# Altium PCB Mobo.PcbDoc (part 1 of 3)
Units mm, origin at the board's own origin, x right, y up, seen from the top; angles counter-clockwise.
Board outline 192.03 x 94.33 mm, 5 copper layers (Top Layer, POWER, InternalPlane2, GND, Bottom Layer); 327 components, 282 nets, 956 pads, 380 vias.
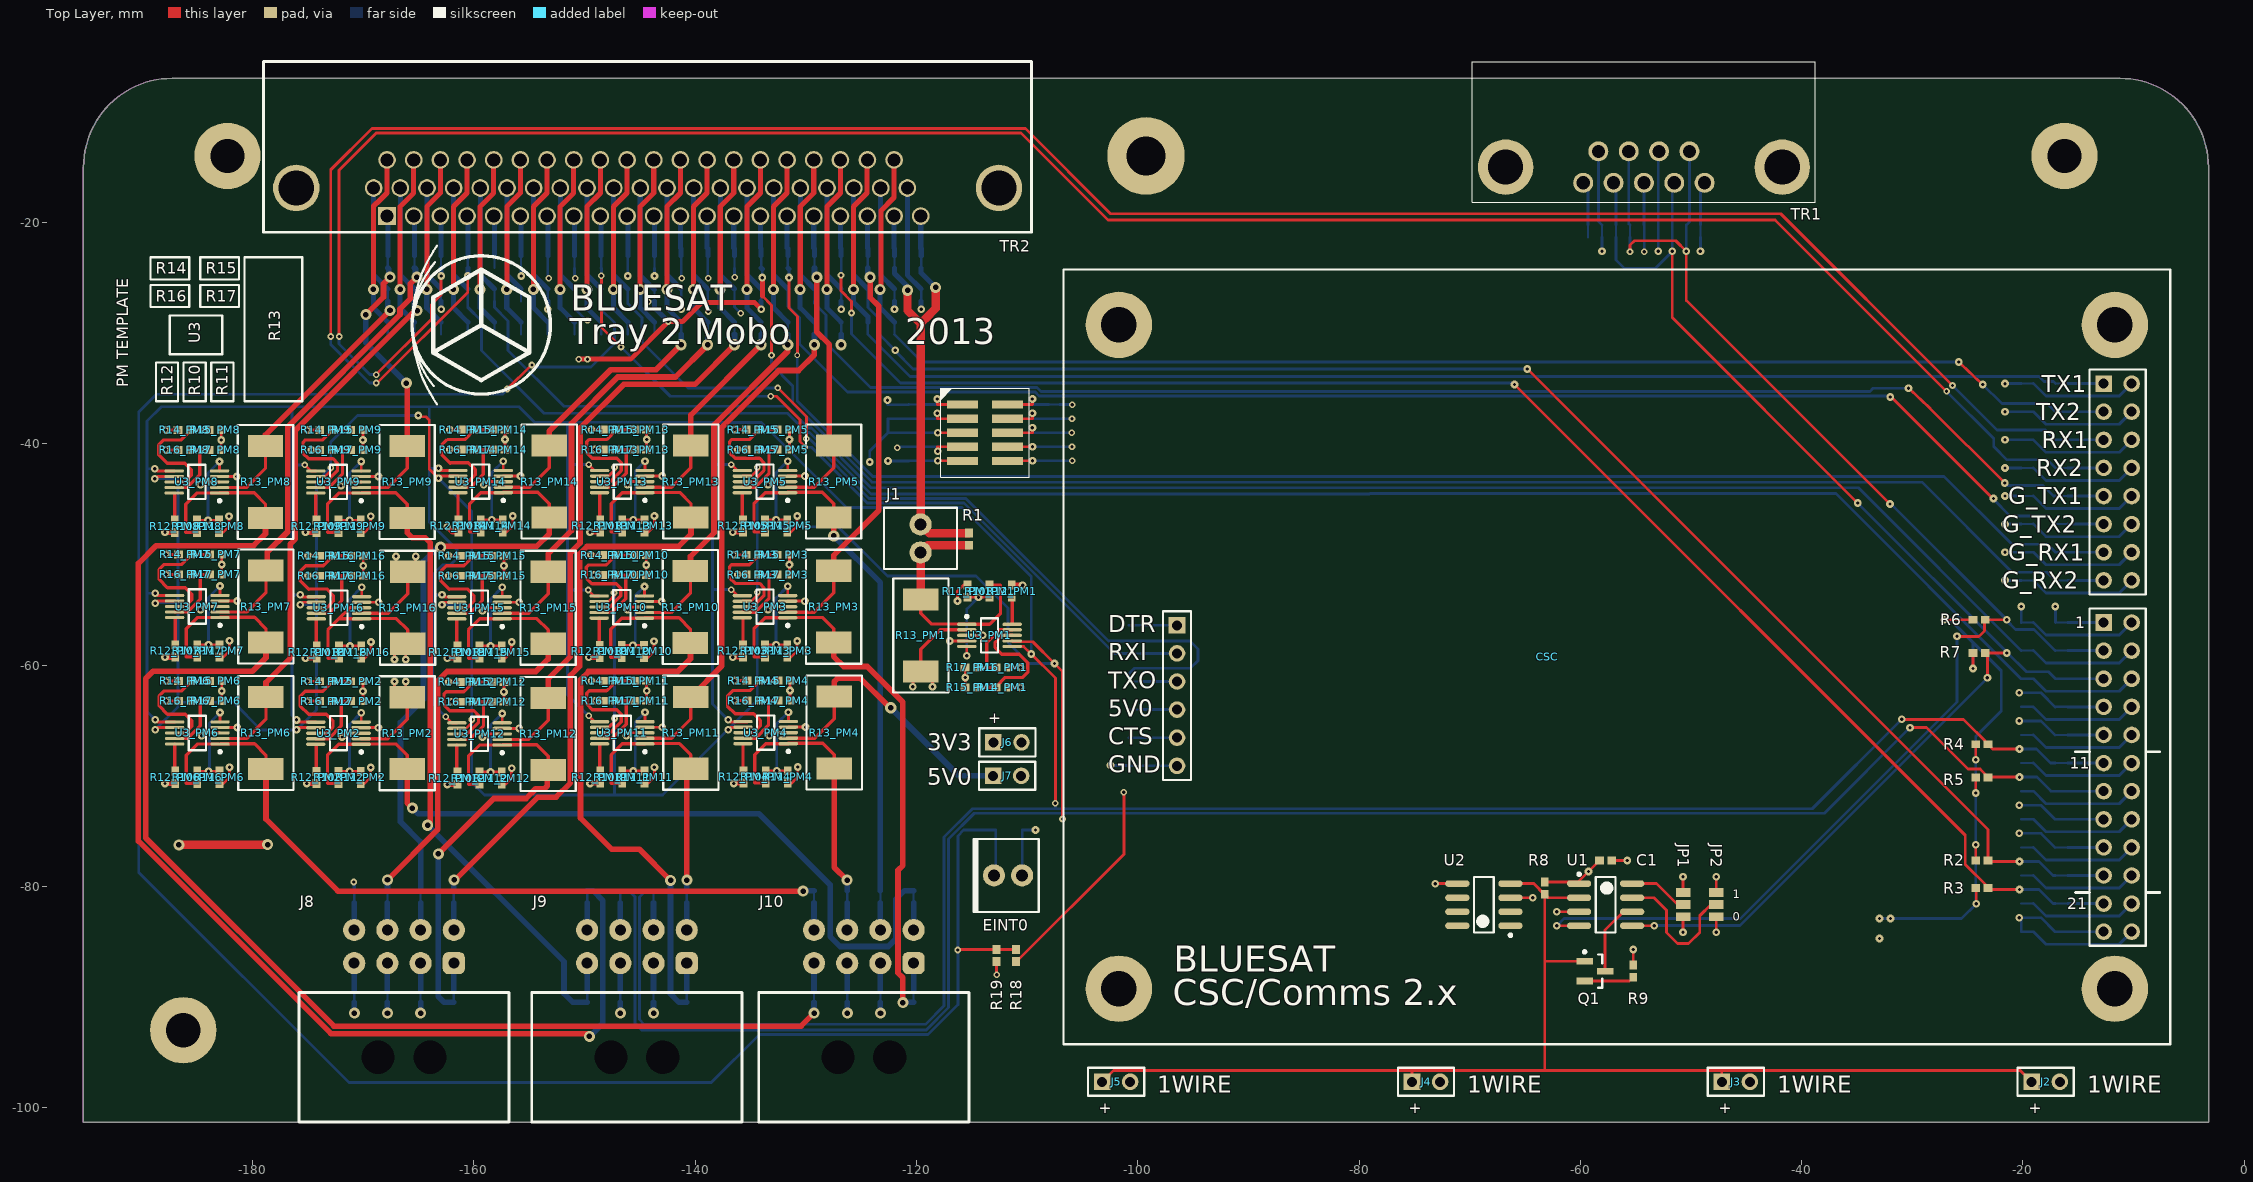
[diagram p0: Top Layer view]
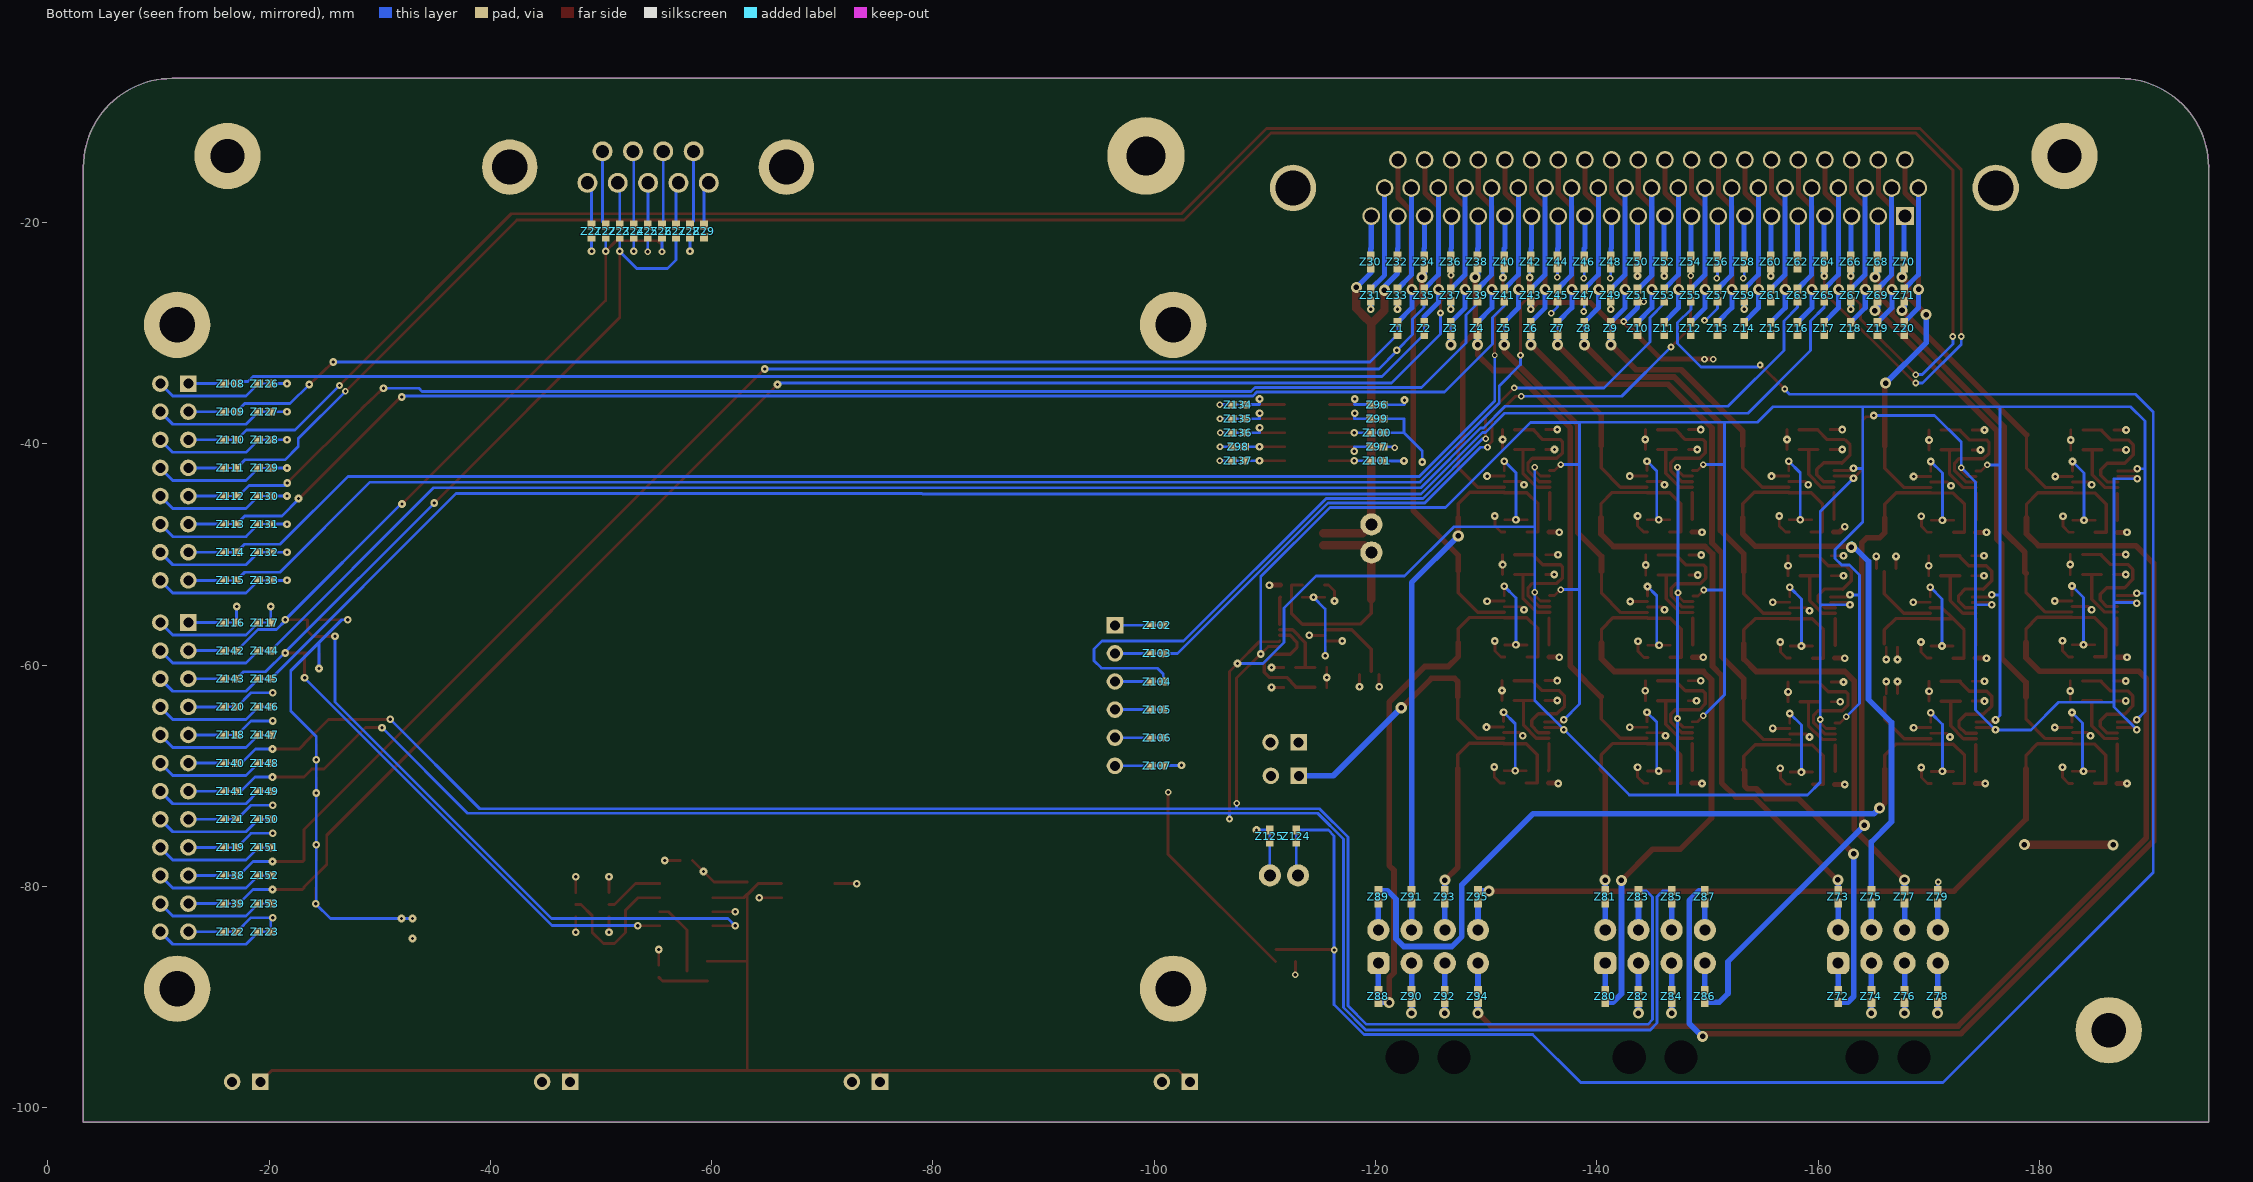
[diagram p1: Bottom Layer view, seen from below]
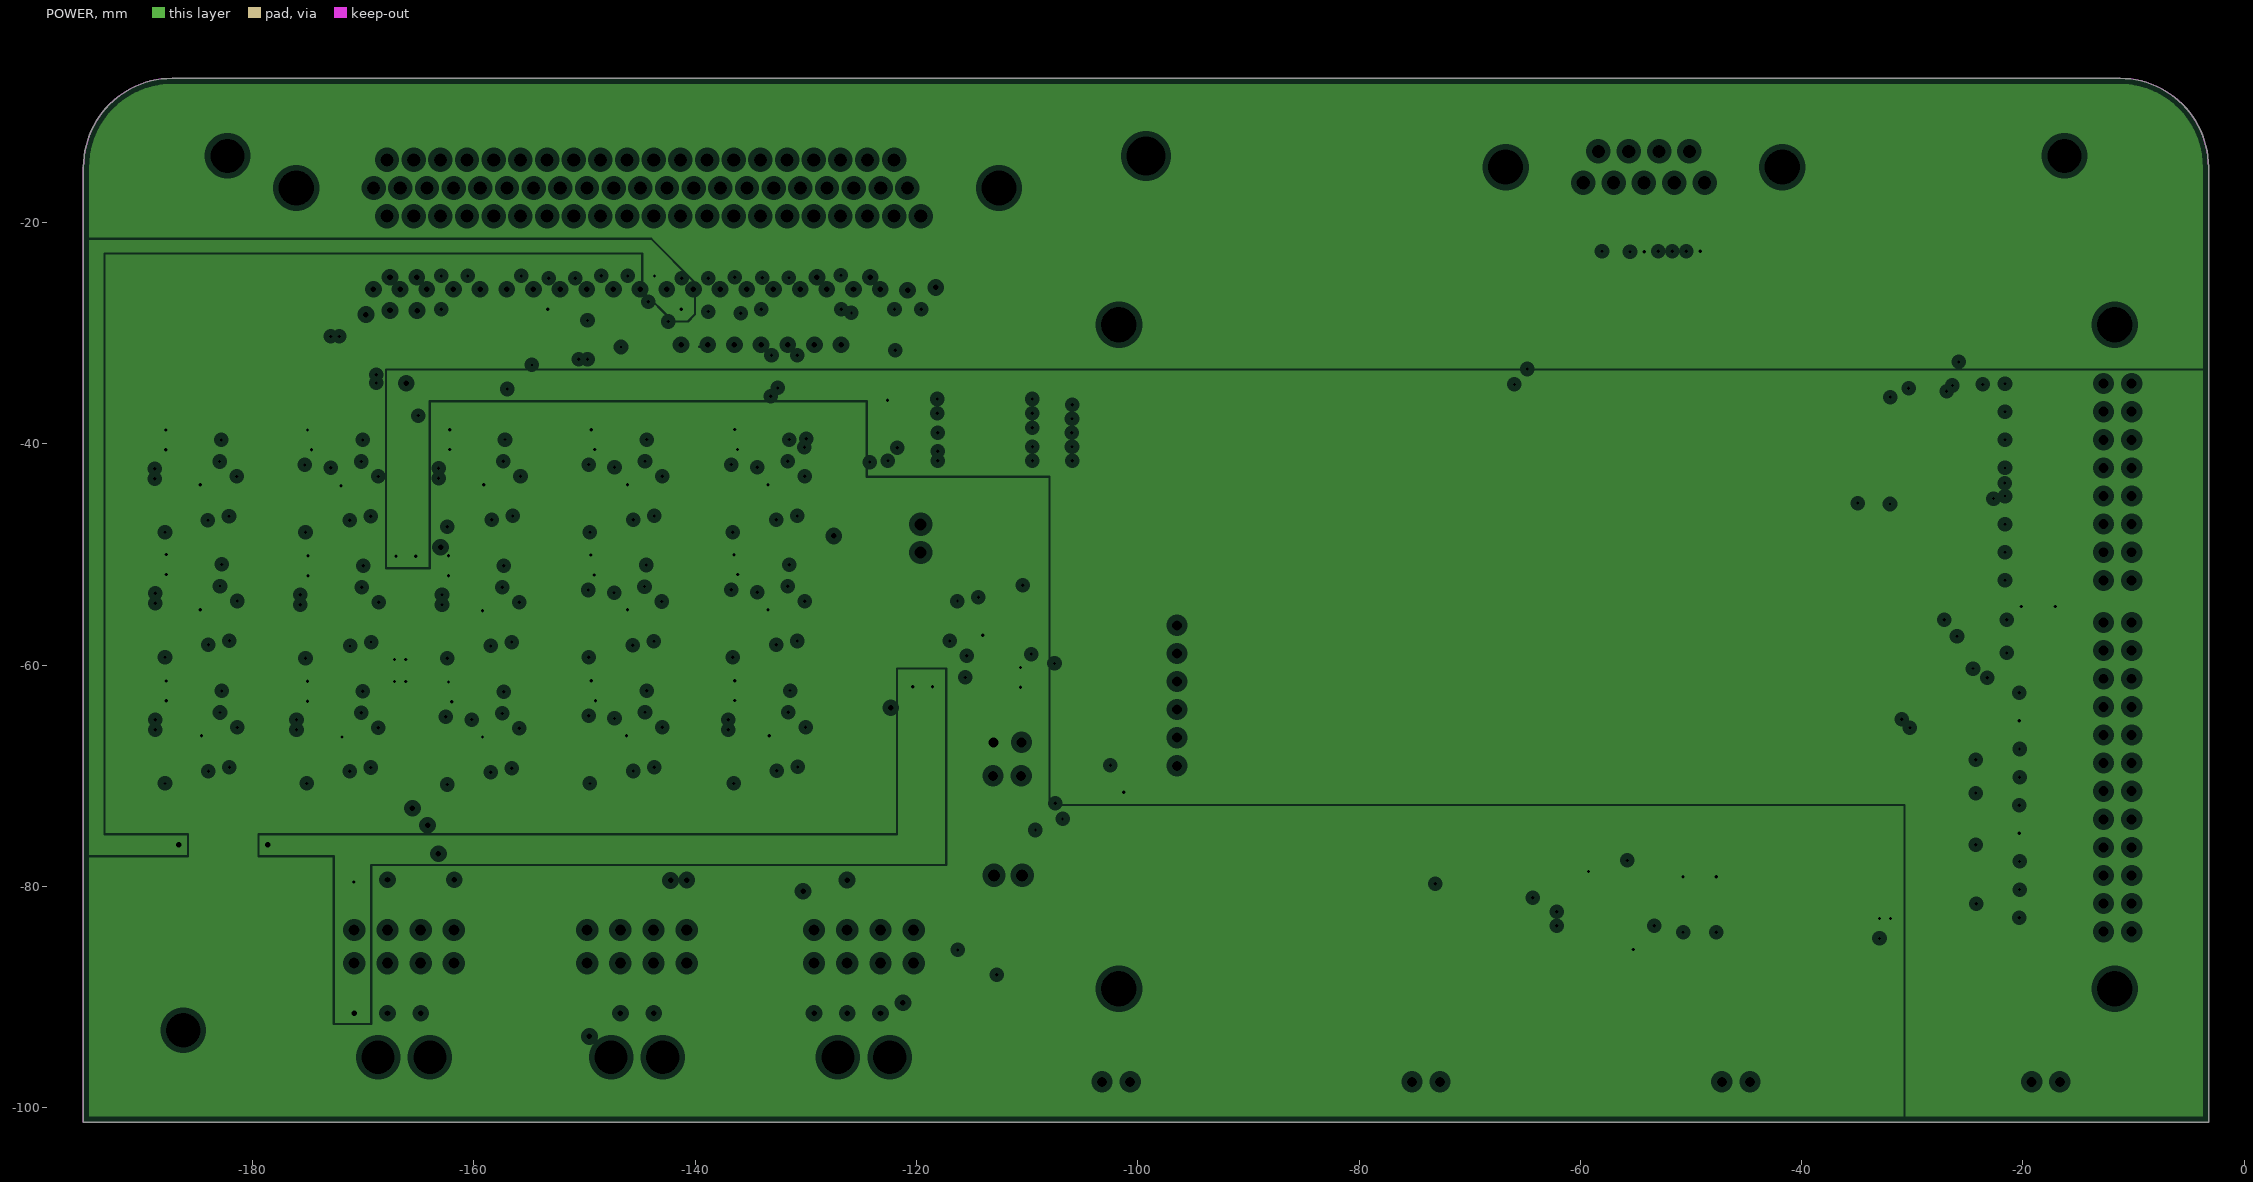
[diagram p2: POWER, clearances drawn from the general rule]
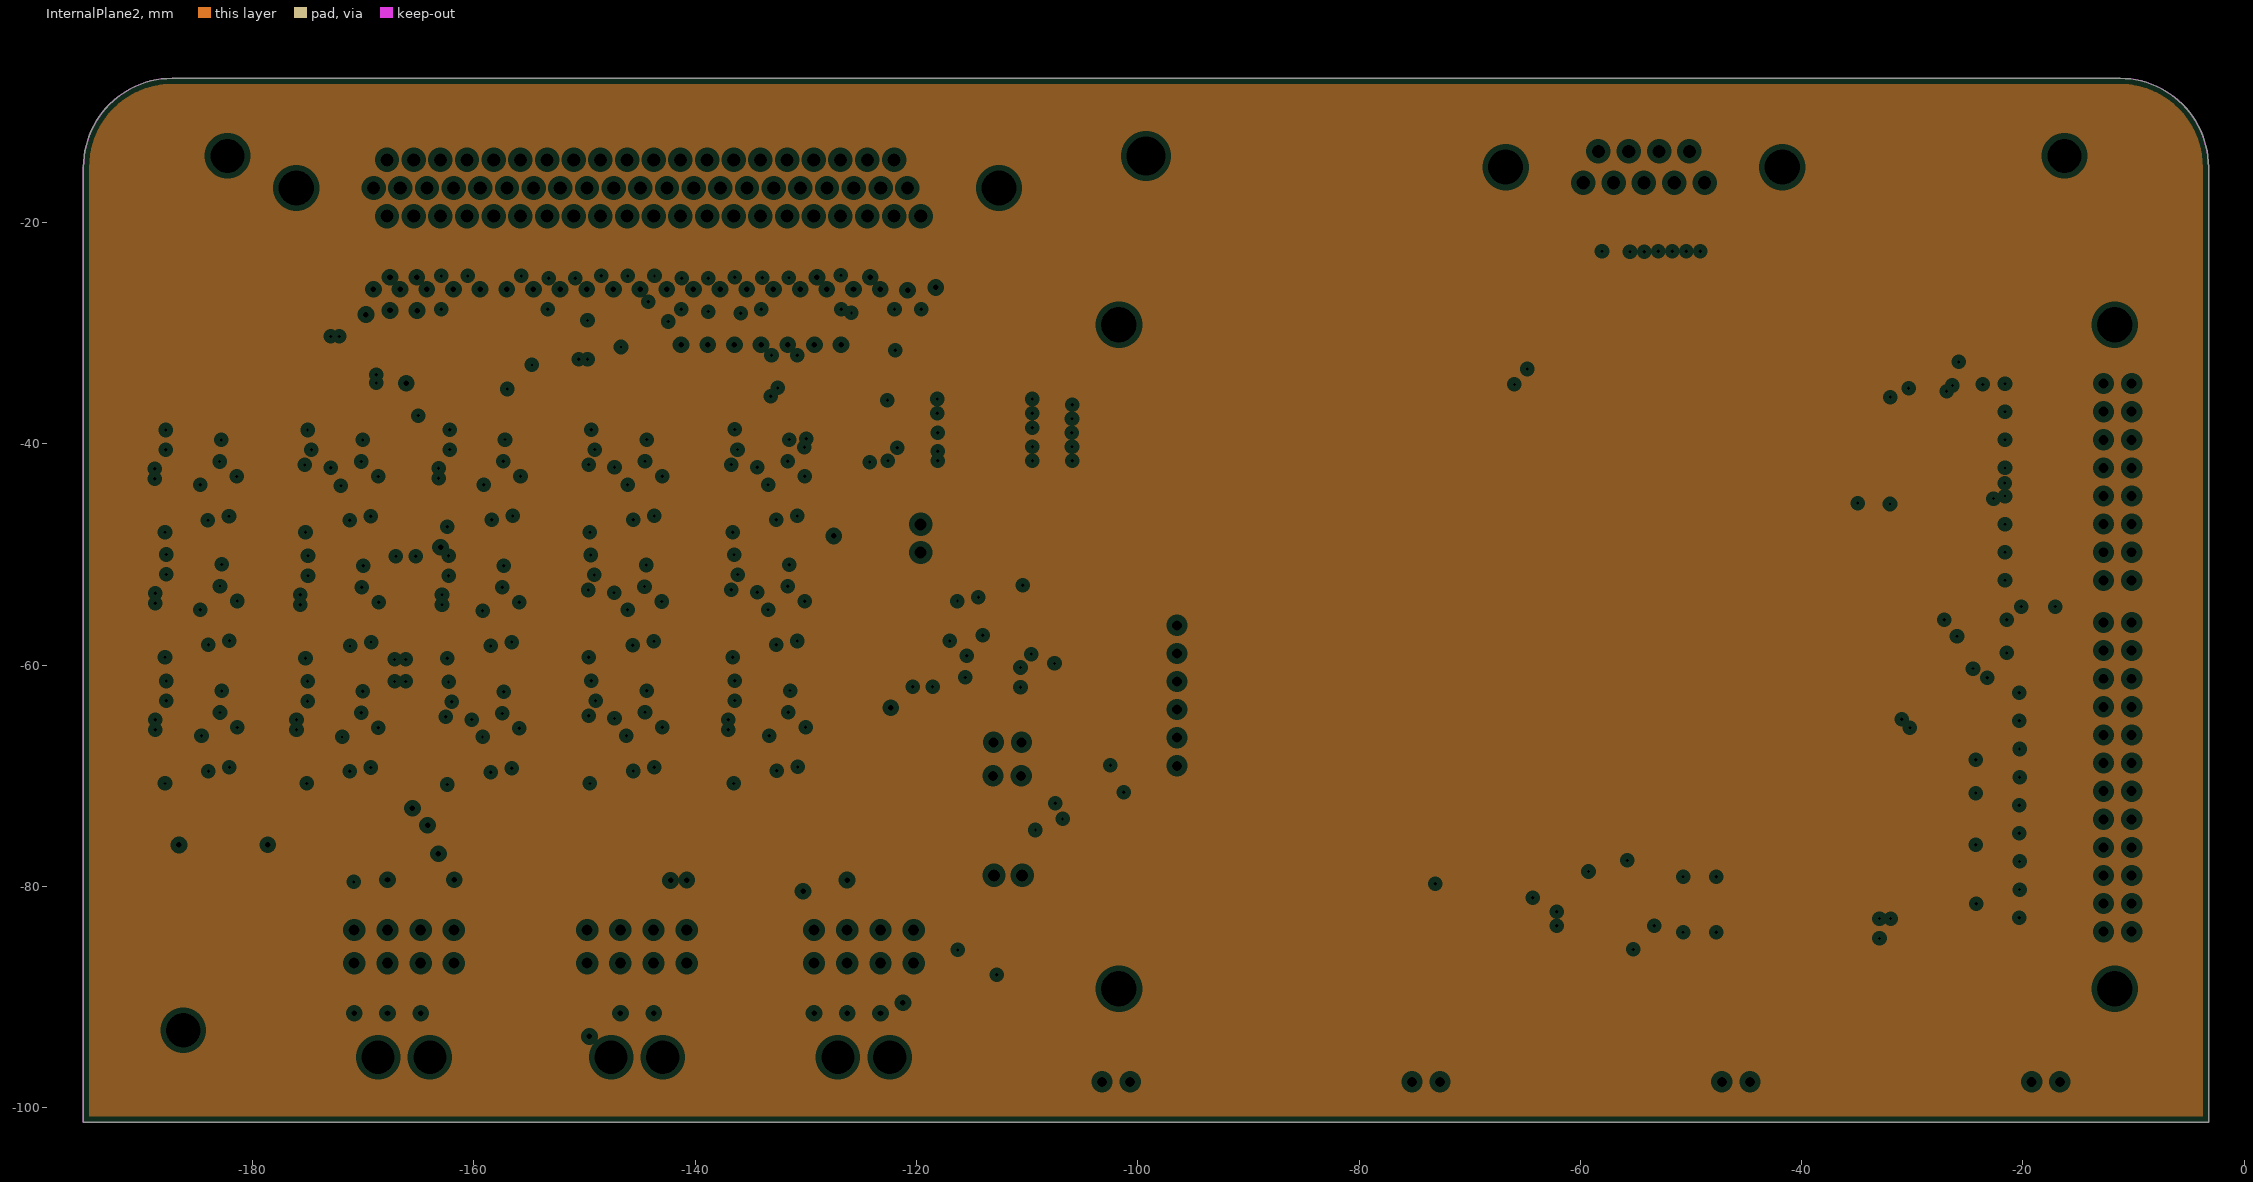
[diagram p3: InternalPlane2, clearances drawn from the general rule]
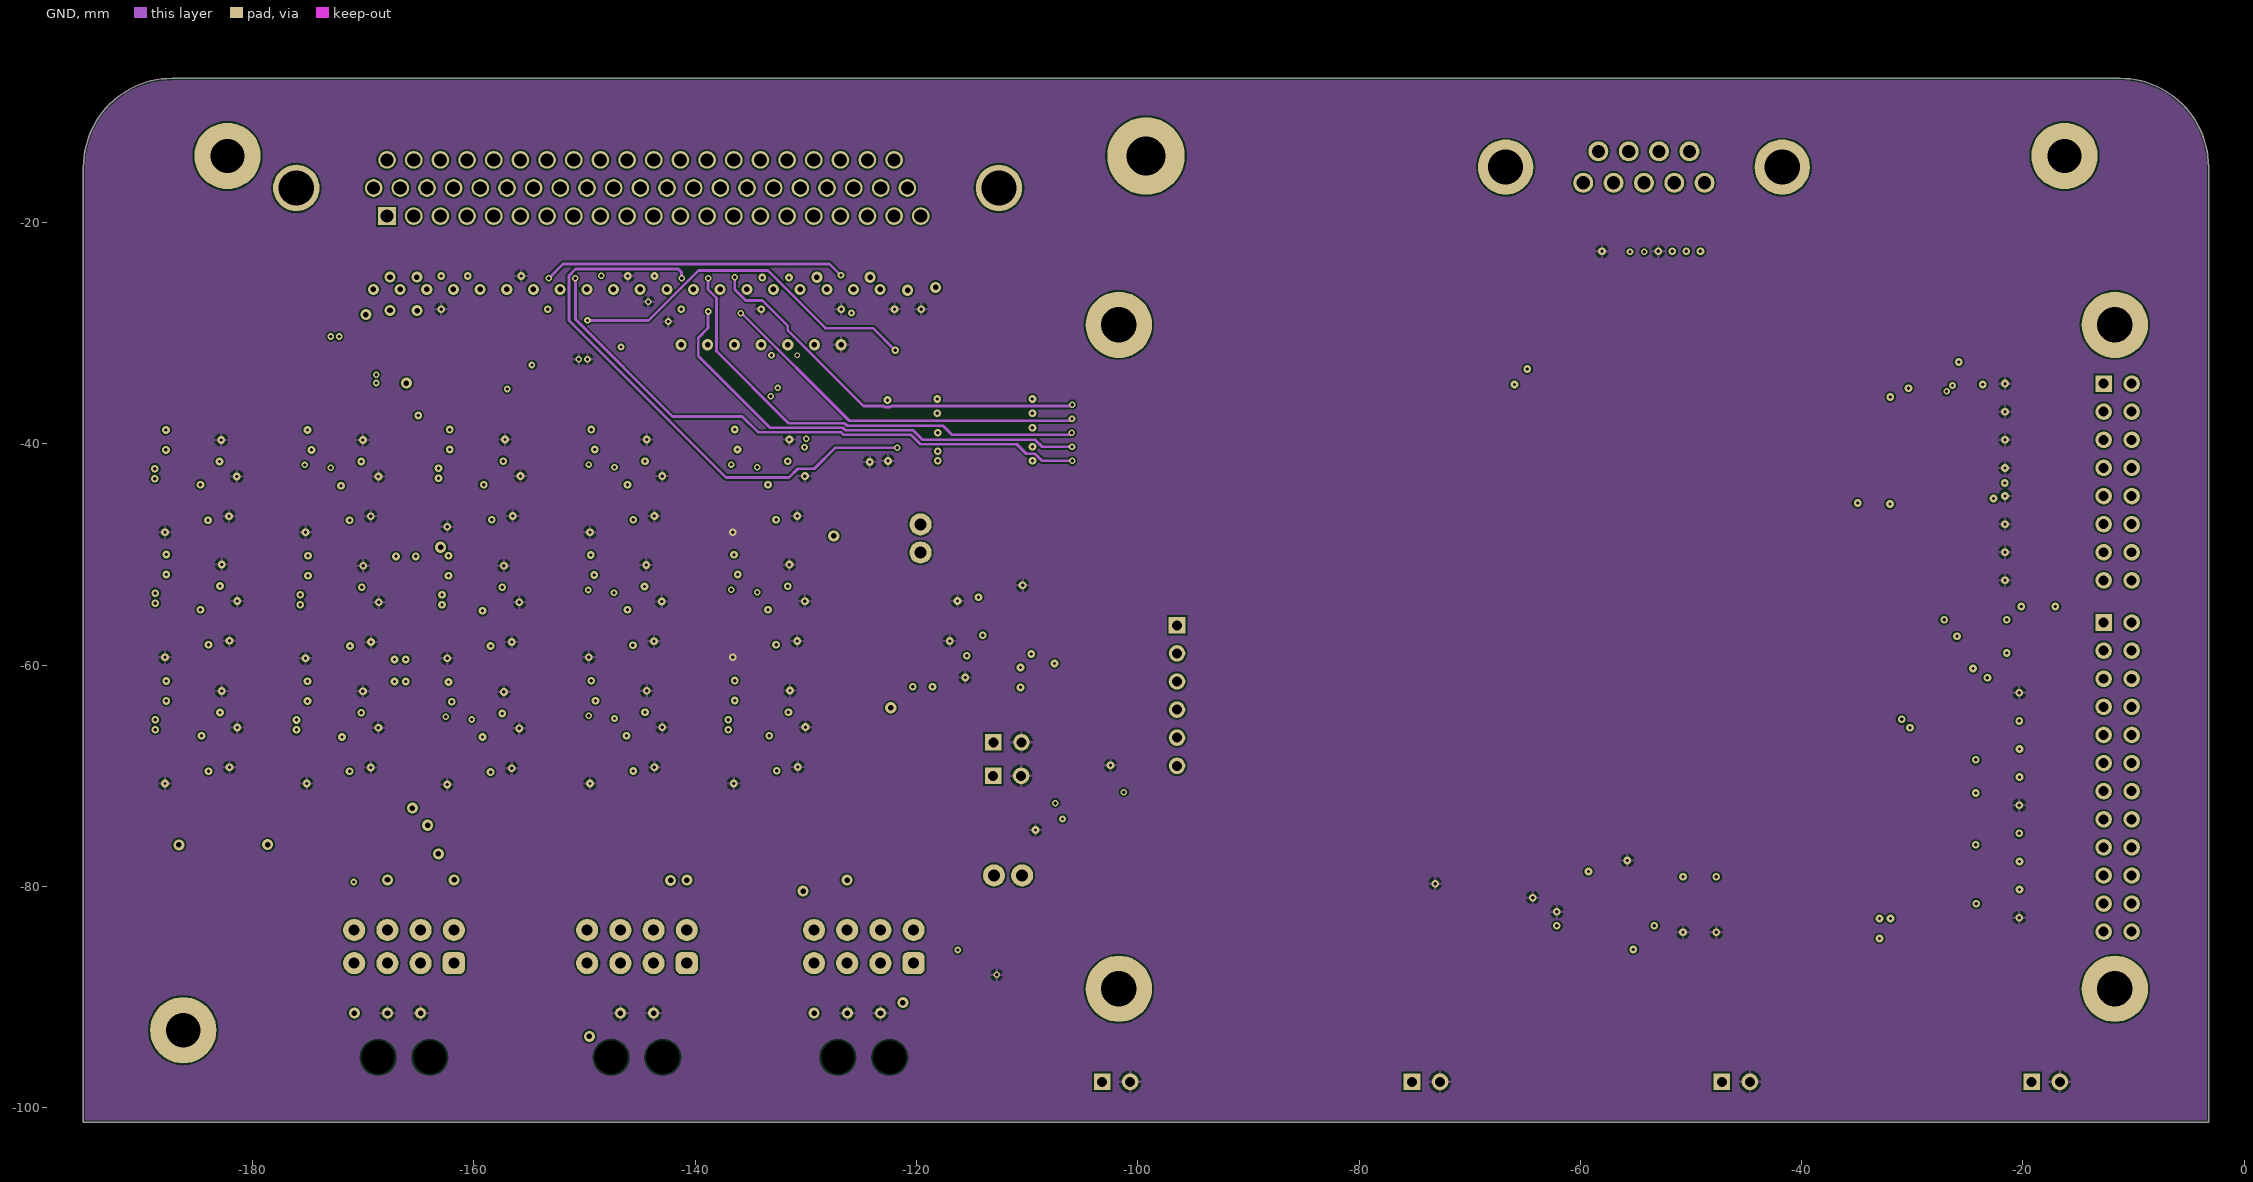
[diagram p4: GND]

## Layer stack, top to bottom
Top Layer: signal copper 0.0356
Dielectric: core 0.32, FR-4, Dk 4.8
POWER: plane copper 0.0356, net (Multiple Nets)
Dielectric: prepreg 0.32, FR-4, Dk 4.8
InternalPlane2: plane copper 0.0356
Dielectric: dielectric 0.32, FR-4, Dk 4.8
GND: signal copper 0.0356
Dielectric: core 0.32, FR-4, Dk 4.8
Bottom Layer: signal copper 0.0356

## Board outline
-195.263,-101.3 -195.263,-15 cw(c-187.25,-15) -187.25,-6.987 -11.25,-6.987 cw(c-11.25,-7) -11.25,-6.987 ccw(c-11.25,-15) -11.25,-6.987 ccw(c-11.25,-7) -11.25,-6.987 cw(c-11.25,-15) -3.237,-15 -3.237,-101.3 cw(c-3.25,-101.3) -3.25,-101.313 -195.25,-101.313 cw(c-195.25,-101.3)

## Design rules (kind name [scope] priority, off if disabled: settings)
AssemblyTestPointUsage [All] p1 off:
AssemblyTestpoint [All] p1 off: testpointundercomponent=TRUE minsize=1.016 maxsize=2.54 preferedsize=1.524 minholesize=0 maxholesize=1.016 preferedholesize=0.813 testpointgrid=0.025 usegrid=TRUE gridtolerance=0 allowsidetop=TRUE allowsidebottom=TRUE
Clearance [All] p1: gap=0.152
ComponentClearance ComponentClearance_1 [OnLayer('Mechanical 1')] p1: gap=-2.54 collisioncheckmode=3 verticalgap=-5.055 showdistances=FALSE
ComponentClearance [All] p2: gap=0.254 collisioncheckmode=3 verticalgap=0.254 showdistances=FALSE
FabricationTestPointUsage [All] p1 off: valid=0 allowmultiple=FALSE
FabricationTestpoint [All] p1 off: side=3 testpointundercomponent=TRUE minsize=1.016 maxsize=2.54 preferedsize=1.524 minholesize=0 maxholesize=1.016 preferedholesize=0.813 testpointgrid=0.025 allowsidetop=TRUE allowsidebottom=TRUE usegrid=TRUE gridtolerance=0
HoleSize [All] p1: absolutevalues=TRUE maxlimit=254 minlimit=0.025 maxpercent=80.000 minpercent=20.000
MinimumSolderMaskSliver [All] p1: minsoldermaskwidth=0.051
PlaneClearance [All] p1: clearance=0.508
PlaneConnect [All] p1: planeconnectstyle=Relief reliefexpansion=0.508 reliefentries=4 reliefconductorwidth=0.254 reliefairgap=0.254
PolygonConnect [All] p1: connectstyle=Relief reliefconductorwidth=0.254 reliefentries=4 polygonreliefangle="90 Angle" airgapwidth=0.254
RoomDefinition PM12 [InComponentClass('PM12')] p1: confinementstyle=ConfineIn formatcopy=TRUE lockcomponents=FALSE outline -150.416,-60.561 -163.016,-60.561 -163.016,-71.761 -150.416,-71.761
RoomDefinition PM1 [InComponentClass('PM1')] p2: confinementstyle=ConfineIn formatcopy=TRUE lockcomponents=FALSE outline -122.45,-62.992 -109.691,-62.992 -109.691,-51.792 -122.45,-51.792
RoomDefinition PM16 [InComponentClass('PM16')] p3: confinementstyle=ConfineIn formatcopy=TRUE lockcomponents=FALSE outline -163.116,-49.161 -175.716,-49.161 -175.716,-60.361 -163.116,-60.361
RoomDefinition PM15 [InComponentClass('PM15')] p4: confinementstyle=ConfineIn formatcopy=TRUE lockcomponents=FALSE outline -150.416,-49.161 -163.016,-49.161 -163.016,-60.361 -150.416,-60.361
RoomDefinition PM14 [InComponentClass('PM14')] p5: confinementstyle=ConfineIn formatcopy=TRUE lockcomponents=FALSE outline -150.316,-37.761 -162.916,-37.761 -162.916,-48.961 -150.316,-48.961
RoomDefinition PM13 [InComponentClass('PM13')] p6: confinementstyle=ConfineIn formatcopy=TRUE lockcomponents=FALSE outline -137.516,-37.761 -150.116,-37.761 -150.116,-48.961 -137.516,-48.961
RoomDefinition PM11 [InComponentClass('PM11')] p7: confinementstyle=ConfineIn formatcopy=TRUE lockcomponents=FALSE outline -137.516,-60.461 -150.116,-60.461 -150.116,-71.661 -137.516,-71.661
RoomDefinition PM10 [InComponentClass('PM10')] p8: confinementstyle=ConfineIn formatcopy=TRUE lockcomponents=FALSE outline -137.557,-49.093 -150.157,-49.093 -150.157,-60.293 -137.557,-60.293
RoomDefinition PM9 [InComponentClass('PM9')] p9: confinementstyle=ConfineIn formatcopy=TRUE lockcomponents=FALSE outline -163.157,-37.793 -175.757,-37.793 -175.757,-48.993 -163.157,-48.993
RoomDefinition PM8 [InComponentClass('PM8')] p10: confinementstyle=ConfineIn formatcopy=TRUE lockcomponents=FALSE outline -175.957,-37.793 -188.557,-37.793 -188.557,-48.993 -175.957,-48.993
RoomDefinition PM7 [InComponentClass('PM7')] p11: confinementstyle=ConfineIn formatcopy=TRUE lockcomponents=FALSE outline -175.916,-49.046 -188.516,-49.046 -188.516,-60.246 -175.916,-60.246
RoomDefinition PM6 [InComponentClass('PM6')] p12: confinementstyle=ConfineIn formatcopy=TRUE lockcomponents=FALSE outline -175.916,-60.476 -188.516,-60.476 -188.516,-71.676 -175.916,-71.676
RoomDefinition PM5 [InComponentClass('PM5')] p13: confinementstyle=ConfineIn formatcopy=TRUE lockcomponents=FALSE outline -124.616,-37.761 -137.216,-37.761 -137.216,-48.961 -124.616,-48.961
RoomDefinition PM4 [InComponentClass('PM4')] p14: confinementstyle=ConfineIn formatcopy=TRUE lockcomponents=FALSE outline -124.557,-60.443 -137.157,-60.443 -137.157,-71.643 -124.557,-71.643
RoomDefinition PM3 [InComponentClass('PM3')] p15: confinementstyle=ConfineIn formatcopy=TRUE lockcomponents=FALSE outline -124.616,-49.061 -137.216,-49.061 -137.216,-60.261 -124.616,-60.261
RoomDefinition PM2 [InComponentClass('PM2')] p16: confinementstyle=ConfineIn formatcopy=TRUE lockcomponents=FALSE outline -163.157,-60.493 -175.757,-60.493 -175.757,-71.693 -163.157,-71.693
RoutingVias [All] p1: holewidth=0.3 width=0.7 viastyle="Through Hole" minholewidth=0.3 minwidth=0.6 maxholewidth=0.711 maxwidth=1.27
SilkToSolderMaskClearance SilkscreenOverComponentPads [IsPad] p1: minsilkscreentomaskgap=0.076 clearancetoexposedcopper=TRUE
SolderMaskExpansion [All] p1: expansion=0.025
Width Width_1 [All] p1: maxlimit=1.016 minlimit=0.254 preferedwidth=0.508
Width [All] p2: maxlimit=2.54 minlimit=0.152 preferedwidth=0.254
18 further rules are at their usual default settings.

## Classes and differential pairs
component class Mobo: CSC J1 J2 J3 J4 J5 J6 J7 J8 J9 J10 R1 R2 R3 R4 R5 R6 R7 R18 R19 TR1 TR2 Z1 Z2 Z3 Z4 Z5 Z6 Z7 Z8 Z9 Z10 Z11 Z12 Z13 Z14 Z15 Z16 Z17 Z18 Z19 Z20 Z21 Z22 Z23 Z24 Z25 Z26 Z27 Z28 Z29 Z30 Z31 Z32 Z33 Z34 Z35 Z36 Z37 Z38 Z39 Z40 Z41 Z42 Z43 Z44 Z45 Z46 Z47 Z48 Z49 Z50 Z51 Z52 Z53 Z54 Z55 Z56 Z57 Z58 Z59 Z60 Z61 Z62 Z63 Z64 Z65 Z66 Z67 Z68 Z69 Z70 Z71 Z72 Z73 Z74 Z75 Z76 Z77 Z78 Z79 Z80 Z81 Z82 Z83 Z84 Z85 Z86 Z87 Z88 Z89 Z90 Z91 Z92 Z93 Z94 Z95 Z96 Z97 Z98 Z99 Z100 Z101 Z102 Z103 Z104 Z105 Z106 Z107 Z108 Z109 Z110 Z111 Z112 Z113 Z114 Z115 Z116 Z117 Z118 Z119 Z120 Z121 Z122 Z123 Z124 Z125 Z126 Z127 Z128 Z129 Z130 Z131 Z132 Z133 Z134 Z135 Z136 Z137 Z138 Z139 Z140 Z141 Z142 Z143 Z144 Z145 Z146 Z147 Z148 Z149 Z150 Z151 Z152 Z153
component class Designator: C1 JP1 JP2 Q1 R8 R9 U1
component class PM1: R10_PM1 R11_PM1 R12_PM1 R13_PM1 R14_PM1 R15_PM1 R16_PM1 R17_PM1 U3_PM1
component class PM2: R10_PM2 R11_PM2 R12_PM2 R13_PM2 R14_PM2 R15_PM2 R16_PM2 R17_PM2 U3_PM2
component class PM3: R10_PM3 R11_PM3 R12_PM3 R13_PM3 R14_PM3 R15_PM3 R16_PM3 R17_PM3 U3_PM3
component class PM4: R10_PM4 R11_PM4 R12_PM4 R13_PM4 R14_PM4 R15_PM4 R16_PM4 R17_PM4 U3_PM4
component class PM5: R10_PM5 R11_PM5 R12_PM5 R13_PM5 R14_PM5 R15_PM5 R16_PM5 R17_PM5 U3_PM5
component class PM6: R10_PM6 R11_PM6 R12_PM6 R13_PM6 R14_PM6 R15_PM6 R16_PM6 R17_PM6 U3_PM6
component class PM7: R10_PM7 R11_PM7 R12_PM7 R13_PM7 R14_PM7 R15_PM7 R16_PM7 R17_PM7 U3_PM7
component class PM8: R10_PM8 R11_PM8 R12_PM8 R13_PM8 R14_PM8 R15_PM8 R16_PM8 R17_PM8 U3_PM8
component class PM9: R10_PM9 R11_PM9 R12_PM9 R13_PM9 R14_PM9 R15_PM9 R16_PM9 R17_PM9 U3_PM9
component class PM10: R10_PM10 R11_PM10 R12_PM10 R13_PM10 R14_PM10 R15_PM10 R16_PM10 R17_PM10 U3_PM10
component class PM11: R10_PM11 R11_PM11 R12_PM11 R13_PM11 R14_PM11 R15_PM11 R16_PM11 R17_PM11 U3_PM11
component class PM12: R10_PM12 R11_PM12 R12_PM12 R13_PM12 R14_PM12 R15_PM12 R16_PM12 R17_PM12 U3_PM12
component class PM13: R10_PM13 R11_PM13 R12_PM13 R13_PM13 R14_PM13 R15_PM13 R16_PM13 R17_PM13 U3_PM13
component class PM14: R10_PM14 R11_PM14 R12_PM14 R13_PM14 R14_PM14 R15_PM14 R16_PM14 R17_PM14 U3_PM14
component class PM15: R10_PM15 R11_PM15 R12_PM15 R13_PM15 R14_PM15 R15_PM15 R16_PM15 R17_PM15 U3_PM15
component class PM16: R10_PM16 R11_PM16 R12_PM16 R13_PM16 R14_PM16 R15_PM16 R16_PM16 R17_PM16 U3_PM16
channel class PowerMonitor: PM1 PM2 PM3 PM4 PM5 PM6 PM7 PM8 PM9 PM10 PM11 PM12 PM13 PM14 PM15 PM16

## Components (designator, comment, footprint, x,y, rotation, side; value= is the part's Value field where it differs from the comment)
C1 "" R0402M -57.716,-77.661 r180 top
CSC "CSCFootprint" CSCFootprint -11.696,-29.261 r0 top locked
J1 "Screw Term" "100mil ScrewTerm" -122.871,-45.832 r270 top
J2 "Header 2" HDR1X2 -19.216,-97.661 r0 top
J3 "Header 2" HDR1X2 -47.216,-97.661 r0 top
J4 "Header 2" HDR1X2 -75.216,-97.661 r0 top
J5 "Header 2" HDR1X2 -103.216,-97.661 r0 top
J6 "3V3" HDR1X2 -113.041,-66.986 r0 top
J7 "5V0" HDR1X2 -113.066,-70.011 r0 top
J8 "J?" "MOLEX 444280802" -166.3,-95.45 r0 top locked
J9 "J?" "MOLEX 444280802" -145.25,-95.45 r0 top locked
J10 "J?" "MOLEX 444280802" -124.75,-95.45 r0 top locked
JP1 "Jumper Select" J1205M -50.716,-81.661 r270 top
JP2 "Jumper Select" J1205M -47.716,-81.661 r270 top
Q1 "DMP2004K" DMP2004KDITR-ND -58.716,-87.661 r0 top
R1 "DEPOP" R0402M -115.251,-48.626 r90 top
R2 "" R0402M -23.716,-77.661 r0 top
R3 "" R0402M -23.716,-80.161 r0 top
R4 "" R0402M -23.716,-67.161 r0 top
R5 "" R0402M -23.716,-70.161 r0 top
R6 "" R0402M -23.966,-55.911 r0 top
R7 "" R0402M -23.966,-58.911 r0 top
R8 "" R0402M -63.216,-80.161 r90 top
R9 "" R0402M -55.216,-87.661 r90 top
R10_PM1 "" R0402M -113.391,-53.324 r270 top (schematic designator R10)
R10_PM2 "" R0402M -172.216,-70.161 r90 top (schematic designator R10)
R10_PM3 "" R0402M -133.675,-58.729 r90 top (schematic designator R10)
R10_PM4 "" R0402M -133.616,-70.111 r90 top (schematic designator R10)
R10_PM5 "" R0402M -133.675,-47.429 r90 top (schematic designator R10)
R10_PM6 "" R0402M -184.975,-70.144 r90 top (schematic designator R10)
R10_PM7 "" R0402M -184.975,-58.714 r90 top (schematic designator R10)
R10_PM8 "" R0402M -185.016,-47.461 r90 top (schematic designator R10)
R10_PM9 "" R0402M -172.216,-47.461 r90 top (schematic designator R10)
R10_PM10 "" R0402M -146.616,-58.761 r90 top (schematic designator R10)
R10_PM11 "" R0402M -146.575,-70.129 r90 top (schematic designator R10)
R10_PM12 "" R0402M -159.475,-70.229 r90 top (schematic designator R10)
R10_PM13 "" R0402M -146.575,-47.429 r90 top (schematic designator R10)
R10_PM14 "" R0402M -159.375,-47.429 r90 top (schematic designator R10)
R10_PM15 "" R0402M -159.475,-58.829 r90 top (schematic designator R10)
R10_PM16 "" R0402M -172.175,-58.829 r90 top (schematic designator R10)
R11_PM1 "" R0402M -115.391,-53.324 r90 top (schematic designator R11)
R11_PM2 "" R0402M -170.216,-70.161 r270 top (schematic designator R11)
R11_PM3 "" R0402M -131.675,-58.729 r270 top (schematic designator R11)
R11_PM4 "" R0402M -131.616,-70.111 r270 top (schematic designator R11)
R11_PM5 "" R0402M -131.675,-47.429 r270 top (schematic designator R11)
R11_PM6 "" R0402M -182.975,-70.144 r270 top (schematic designator R11)
R11_PM7 "" R0402M -182.975,-58.714 r270 top (schematic designator R11)
R11_PM8 "" R0402M -183.016,-47.461 r270 top (schematic designator R11)
R11_PM9 "" R0402M -170.216,-47.461 r270 top (schematic designator R11)
R11_PM10 "" R0402M -144.616,-58.761 r270 top (schematic designator R11)
R11_PM11 "" R0402M -144.575,-70.129 r270 top (schematic designator R11)
R11_PM12 "" R0402M -157.475,-70.229 r270 top (schematic designator R11)
R11_PM13 "" R0402M -144.575,-47.429 r270 top (schematic designator R11)
R11_PM14 "" R0402M -157.375,-47.429 r270 top (schematic designator R11)
R11_PM15 "" R0402M -157.475,-58.829 r270 top (schematic designator R11)
R11_PM16 "" R0402M -170.175,-58.829 r270 top (schematic designator R11)
R12_PM1 "" R0402M -111.391,-53.324 r90 top (schematic designator R12)
R12_PM2 "" R0402M -174.216,-70.161 r270 top (schematic designator R12)
R12_PM3 "" R0402M -135.675,-58.729 r270 top (schematic designator R12)
R12_PM4 "" R0402M -135.616,-70.111 r270 top (schematic designator R12)
R12_PM5 "" R0402M -135.675,-47.429 r270 top (schematic designator R12)
R12_PM6 "" R0402M -186.975,-70.144 r270 top (schematic designator R12)
R12_PM7 "" R0402M -186.975,-58.714 r270 top (schematic designator R12)
R12_PM8 "" R0402M -187.016,-47.461 r270 top (schematic designator R12)
R12_PM9 "" R0402M -174.216,-47.461 r270 top (schematic designator R12)
R12_PM10 "" R0402M -148.616,-58.761 r270 top (schematic designator R12)
R12_PM11 "" R0402M -148.575,-70.129 r270 top (schematic designator R12)
R12_PM12 "" R0402M -161.475,-70.229 r270 top (schematic designator R12)
R12_PM13 "" R0402M -148.575,-47.429 r270 top (schematic designator R12)
R12_PM14 "" R0402M -161.375,-47.429 r270 top (schematic designator R12)
R12_PM15 "" R0402M -161.475,-58.829 r270 top (schematic designator R12)
R12_PM16 "" R0402M -174.175,-58.829 r270 top (schematic designator R12)
R13_PM1 "" "2515 Resistor" -119.591,-57.324 r90 top (schematic designator R13)
R13_PM2 "" "2515 Resistor" -166.016,-66.161 r270 top (schematic designator R13)
R13_PM3 "" "2515 Resistor" -127.475,-54.729 r270 top (schematic designator R13)
R13_PM4 "" "2515 Resistor" -127.416,-66.111 r270 top (schematic designator R13)
R13_PM5 "" "2515 Resistor" -127.475,-43.429 r270 top (schematic designator R13)
R13_PM6 "" "2515 Resistor" -178.775,-66.144 r270 top (schematic designator R13)
R13_PM7 "" "2515 Resistor" -178.775,-54.714 r270 top (schematic designator R13)
R13_PM8 "" "2515 Resistor" -178.816,-43.461 r270 top (schematic designator R13)
R13_PM9 "" "2515 Resistor" -166.016,-43.461 r270 top (schematic designator R13)
R13_PM10 "" "2515 Resistor" -140.416,-54.761 r270 top (schematic designator R13)
R13_PM11 "" "2515 Resistor" -140.375,-66.129 r270 top (schematic designator R13)
R13_PM12 "" "2515 Resistor" -153.275,-66.229 r270 top (schematic designator R13)
R13_PM13 "" "2515 Resistor" -140.375,-43.429 r270 top (schematic designator R13)
R13_PM14 "" "2515 Resistor" -153.175,-43.429 r270 top (schematic designator R13)
R13_PM15 "" "2515 Resistor" -153.275,-54.829 r270 top (schematic designator R13)
R13_PM16 "" "2515 Resistor" -165.975,-54.829 r270 top (schematic designator R13)
R14_PM1 "" R0402M -112.241,-62.024 r180 top (schematic designator R14)
R14_PM2 "" R0402M -173.366,-61.461 r0 top (schematic designator R14)
R14_PM3 "" R0402M -134.825,-50.029 r0 top (schematic designator R14)
R14_PM4 "" R0402M -134.766,-61.411 r0 top (schematic designator R14)
R14_PM5 "" R0402M -134.825,-38.729 r0 top (schematic designator R14)
R14_PM6 "" R0402M -186.125,-61.444 r0 top (schematic designator R14)
R14_PM7 "" R0402M -186.125,-50.014 r0 top (schematic designator R14)
R14_PM8 "" R0402M -186.166,-38.761 r0 top (schematic designator R14)
R14_PM9 "" R0402M -173.366,-38.761 r0 top (schematic designator R14)
R14_PM10 "" R0402M -147.766,-50.061 r0 top (schematic designator R14)
R14_PM11 "" R0402M -147.725,-61.429 r0 top (schematic designator R14)
R14_PM12 "" R0402M -160.625,-61.529 r0 top (schematic designator R14)
R14_PM13 "" R0402M -147.725,-38.729 r0 top (schematic designator R14)
R14_PM14 "" R0402M -160.525,-38.729 r0 top (schematic designator R14)
R14_PM15 "" R0402M -160.625,-50.129 r0 top (schematic designator R14)
R14_PM16 "" R0402M -173.325,-50.129 r0 top (schematic designator R14)
R15_PM1 "" R0402M -115.041,-62.024 r180 top (schematic designator R15)
R15_PM2 "" R0402M -170.566,-61.461 r0 top (schematic designator R15)
R15_PM3 "" R0402M -132.025,-50.029 r0 top (schematic designator R15)
R15_PM4 "" R0402M -131.966,-61.411 r0 top (schematic designator R15)
R15_PM5 "" R0402M -132.025,-38.729 r0 top (schematic designator R15)
R15_PM6 "" R0402M -183.325,-61.444 r0 top (schematic designator R15)
R15_PM7 "" R0402M -183.325,-50.014 r0 top (schematic designator R15)
R15_PM8 "" R0402M -183.366,-38.761 r0 top (schematic designator R15)
R15_PM9 "" R0402M -170.566,-38.761 r0 top (schematic designator R15)
R15_PM10 "" R0402M -144.966,-50.061 r0 top (schematic designator R15)
R15_PM11 "" R0402M -144.925,-61.429 r0 top (schematic designator R15)
R15_PM12 "" R0402M -157.825,-61.529 r0 top (schematic designator R15)
R15_PM13 "" R0402M -144.925,-38.729 r0 top (schematic designator R15)
R15_PM14 "" R0402M -157.725,-38.729 r0 top (schematic designator R15)
R15_PM15 "" R0402M -157.825,-50.129 r0 top (schematic designator R15)
R15_PM16 "" R0402M -170.525,-50.129 r0 top (schematic designator R15)
R16_PM1 "" R0402M -112.241,-60.224 r180 top (schematic designator R16)
R16_PM2 "" R0402M -173.366,-63.261 r0 top (schematic designator R16)
R16_PM3 "" R0402M -134.825,-51.829 r0 top (schematic designator R16)
R16_PM4 "" R0402M -134.766,-63.211 r0 top (schematic designator R16)
R16_PM5 "" R0402M -134.825,-40.529 r0 top (schematic designator R16)
R16_PM6 "" R0402M -186.125,-63.244 r0 top (schematic designator R16)
R16_PM7 "" R0402M -186.125,-51.814 r0 top (schematic designator R16)
R16_PM8 "" R0402M -186.166,-40.561 r0 top (schematic designator R16)
R16_PM9 "" R0402M -173.366,-40.561 r0 top (schematic designator R16)
R16_PM10 "" R0402M -147.766,-51.861 r0 top (schematic designator R16)
R16_PM11 "" R0402M -147.725,-63.229 r0 top (schematic designator R16)
R16_PM12 "" R0402M -160.625,-63.329 r0 top (schematic designator R16)
R16_PM13 "" R0402M -147.725,-40.529 r0 top (schematic designator R16)
R16_PM14 "" R0402M -160.525,-40.529 r0 top (schematic designator R16)
R16_PM15 "" R0402M -160.625,-51.929 r0 top (schematic designator R16)
R16_PM16 "" R0402M -173.325,-51.929 r0 top (schematic designator R16)
R17_PM1 "" R0402M -115.041,-60.224 r180 top (schematic designator R17)
R17_PM2 "" R0402M -170.566,-63.261 r0 top (schematic designator R17)
R17_PM3 "" R0402M -132.025,-51.829 r0 top (schematic designator R17)
R17_PM4 "" R0402M -131.966,-63.211 r0 top (schematic designator R17)
R17_PM5 "" R0402M -132.025,-40.529 r0 top (schematic designator R17)
R17_PM6 "" R0402M -183.325,-63.244 r0 top (schematic designator R17)
R17_PM7 "" R0402M -183.325,-51.814 r0 top (schematic designator R17)
R17_PM8 "" R0402M -183.366,-40.561 r0 top (schematic designator R17)
R17_PM9 "" R0402M -170.566,-40.561 r0 top (schematic designator R17)
R17_PM10 "" R0402M -144.966,-51.861 r0 top (schematic designator R17)
R17_PM11 "" R0402M -144.925,-63.229 r0 top (schematic designator R17)
R17_PM12 "" R0402M -157.825,-63.329 r0 top (schematic designator R17)
R17_PM13 "" R0402M -144.925,-40.529 r0 top (schematic designator R17)
R17_PM14 "" R0402M -157.725,-40.529 r0 top (schematic designator R17)
R17_PM15 "" R0402M -157.825,-51.929 r0 top (schematic designator R17)
R17_PM16 "" R0402M -170.525,-51.929 r0 top (schematic designator R17)
R18 "DEPOP" R0402M -111,-86.25 r90 top
R19 "DEPOP" R0402M -112.75,-86.25 r270 top
TR1 "D Connector 9" "HD-20 9 POS" -54.257,-15.006 r0 top
TR2 "D Connector 62" "HD-22 62 POS" -176.034,-16.894 r0 top
U1 "DS24820Z+_ND" DS2482-100 -57.716,-81.661 r0 top
U2 "TO-92" DS18S20 -68.716,-81.661 r180 top
U3_PM1 "ADM1191" ADM1191 -113.391,-57.324 r0 top (schematic designator U3)
U3_PM2 "ADM1191" ADM1191 -172.216,-66.161 r180 top (schematic designator U3)
U3_PM3 "ADM1191" ADM1191 -133.675,-54.729 r180 top (schematic designator U3)
U3_PM4 "ADM1191" ADM1191 -133.616,-66.111 r180 top (schematic designator U3)
U3_PM5 "ADM1191" ADM1191 -133.675,-43.429 r180 top (schematic designator U3)
U3_PM6 "ADM1191" ADM1191 -184.975,-66.144 r180 top (schematic designator U3)
U3_PM7 "ADM1191" ADM1191 -184.975,-54.714 r180 top (schematic designator U3)
U3_PM8 "ADM1191" ADM1191 -185.016,-43.461 r180 top (schematic designator U3)
U3_PM9 "ADM1191" ADM1191 -172.216,-43.461 r180 top (schematic designator U3)
U3_PM10 "ADM1191" ADM1191 -146.616,-54.761 r180 top (schematic designator U3)
U3_PM11 "ADM1191" ADM1191 -146.575,-66.129 r180 top (schematic designator U3)
U3_PM12 "ADM1191" ADM1191 -159.475,-66.229 r180 top (schematic designator U3)
U3_PM13 "ADM1191" ADM1191 -146.575,-43.429 r180 top (schematic designator U3)
U3_PM14 "ADM1191" ADM1191 -159.375,-43.429 r180 top (schematic designator U3)
U3_PM15 "ADM1191" ADM1191 -159.475,-54.829 r180 top (schematic designator U3)
U3_PM16 "ADM1191" ADM1191 -172.175,-54.829 r180 top (schematic designator U3)
Z1 "" Short -121.975,-29.575 r90 bottom
Z2 "" Short -124.385,-29.575 r90 bottom
Z3 "" Short -126.795,-29.575 r90 bottom
Z4 "" Short -129.205,-29.575 r90 bottom
Z5 "" Short -131.615,-29.575 r90 bottom
Z6 "" Short -134.025,-29.575 r90 bottom
Z7 "" Short -136.435,-29.575 r90 bottom
Z8 "" Short -138.845,-29.575 r90 bottom
Z9 "" Short -141.255,-29.575 r90 bottom
Z10 "" Short -143.665,-29.575 r90 bottom
Z11 "" Short -146.075,-29.575 r90 bottom
Z12 "" Short -148.485,-29.575 r90 bottom
Z13 "" Short -150.895,-29.575 r90 bottom
Z14 "" Short -153.305,-29.575 r90 bottom
Z15 "" Short -155.715,-29.575 r90 bottom
Z16 "" Short -158.125,-29.575 r90 bottom
Z17 "" Short -160.535,-29.575 r90 bottom
Z18 "" Short -162.945,-29.575 r90 bottom
Z19 "" Short -165.355,-29.575 r90 bottom
Z20 "" Short -167.765,-29.575 r90 bottom
Z21 "" Short -49.153,-20.802 r270 bottom
Z22 "" Short -50.423,-20.802 r270 bottom
Z23 "" Short -51.693,-20.802 r270 bottom
Z24 "" Short -52.963,-20.802 r270 bottom
Z25 "" Short -54.233,-20.802 r270 bottom
Z26 "" Short -55.503,-20.802 r270 bottom
Z27 "" Short -56.773,-20.802 r270 bottom
Z28 "" Short -58.043,-20.802 r270 bottom
Z29 "" Short -59.313,-20.802 r270 bottom
Z30 "" Short -119.565,-23.575 r270 bottom
Z31 "" Short -119.565,-26.575 r270 bottom
Z32 "" Short -121.975,-23.575 r270 bottom
Z33 "" Short -121.975,-26.575 r270 bottom
Z34 "" Short -124.385,-23.575 r270 bottom
Z35 "" Short -124.385,-26.575 r270 bottom
Z36 "" Short -126.795,-23.575 r270 bottom
Z37 "" Short -126.795,-26.575 r270 bottom
Z38 "" Short -129.205,-23.575 r270 bottom
Z39 "" Short -129.205,-26.575 r270 bottom
Z40 "" Short -131.615,-23.575 r270 bottom
Z41 "" Short -131.615,-26.575 r270 bottom
Z42 "" Short -134.025,-23.575 r270 bottom
Z43 "" Short -134.025,-26.575 r270 bottom
Z44 "" Short -136.435,-23.575 r270 bottom
Z45 "" Short -136.435,-26.575 r270 bottom
Z46 "" Short -138.845,-23.575 r270 bottom
Z47 "" Short -138.845,-26.575 r270 bottom
Z48 "" Short -141.255,-23.575 r270 bottom
Z49 "" Short -141.255,-26.575 r270 bottom
Z50 "" Short -143.665,-23.575 r270 bottom
Z51 "" Short -143.665,-26.575 r270 bottom
Z52 "" Short -146.075,-23.575 r270 bottom
Z53 "" Short -146.075,-26.575 r270 bottom
Z54 "" Short -148.485,-23.575 r270 bottom
Z55 "" Short -148.485,-26.575 r270 bottom
Z56 "" Short -150.895,-23.575 r270 bottom
Z57 "" Short -150.895,-26.575 r270 bottom
Z58 "" Short -153.305,-23.575 r270 bottom
Z59 "" Short -153.305,-26.575 r270 bottom
Z60 "" Short -155.715,-23.575 r270 bottom
Z61 "" Short -155.715,-26.575 r270 bottom
Z62 "" Short -158.125,-23.575 r270 bottom
Z63 "" Short -158.125,-26.575 r270 bottom
Z64 "" Short -160.535,-23.575 r270 bottom
Z65 "" Short -160.535,-26.575 r270 bottom
Z66 "" Short -162.945,-23.575 r270 bottom
Z67 "" Short -162.945,-26.575 r270 bottom
Z68 "" Short -165.355,-23.575 r270 bottom
Z69 "" Short -165.355,-26.575 r270 bottom
Z70 "" Short -167.765,-23.575 r270 bottom
Z71 "" Short -167.765,-26.575 r270 bottom
Z72 "" Short -161.8,-89.941 r90 bottom
Z73 "" Short -161.8,-80.941 r270 bottom
Z74 "" Short -164.8,-89.941 r90 bottom
Z75 "" Short -164.8,-80.941 r270 bottom
Z76 "" Short -167.8,-89.941 r90 bottom
Z77 "" Short -167.8,-80.941 r270 bottom
Z78 "" Short -170.8,-89.941 r90 bottom
Z79 "" Short -170.8,-80.941 r270 bottom
Z80 "" Short -140.75,-89.941 r90 bottom
Z81 "" Short -140.75,-80.941 r270 bottom
Z82 "" Short -143.75,-89.941 r90 bottom
Z83 "" Short -143.75,-80.941 r270 bottom
Z84 "" Short -146.75,-89.941 r90 bottom
Z85 "" Short -146.75,-80.941 r270 bottom
Z86 "" Short -149.75,-89.941 r90 bottom
Z87 "" Short -149.75,-80.941 r270 bottom
Z88 "" Short -120.25,-89.941 r90 bottom
Z89 "" Short -120.25,-80.941 r270 bottom
Z90 "" Short -123.25,-89.941 r90 bottom
Z91 "" Short -123.25,-80.941 r270 bottom
Z92 "" Short -126.25,-89.941 r90 bottom
Z93 "" Short -126.25,-80.941 r270 bottom
Z94 "" Short -129.25,-89.941 r90 bottom
Z95 "" Short -129.25,-80.941 r270 bottom
Z96 "" Short -120.138,-36.471 r0 bottom
Z97 "" Short -120.138,-40.281 r0 bottom
Z98 "" Short -107.588,-40.281 r180 bottom
Z99 "" Short -120.138,-37.741 r0 bottom
Z100 "" Short -120.138,-39.011 r0 bottom
Z101 "" Short -120.138,-41.551 r0 bottom
Z102 "" Short -100.256,-56.411 r0 bottom
Z103 "" Short -100.256,-58.951 r0 bottom
Z104 "" Short -100.256,-61.491 r0 bottom
Z105 "" Short -100.256,-64.031 r0 bottom
Z106 "" Short -100.256,-66.571 r0 bottom
Z107 "" Short -100.256,-69.111 r0 bottom
Z108 "" Short -16.526,-34.571 r0 bottom
Z109 "" Short -16.526,-37.111 r0 bottom
Z110 "" Short -16.526,-39.651 r0 bottom
Z111 "" Short -16.526,-42.191 r0 bottom
Z112 "" Short -16.526,-44.731 r0 bottom
Z113 "" Short -16.526,-47.271 r0 bottom
Z114 "" Short -16.526,-49.811 r0 bottom
Z115 "" Short -16.526,-52.351 r0 bottom
Z116 "" Short -16.526,-56.161 r0 bottom
Z117 "" Short -19.616,-56.161 r0 bottom
Z118 "" Short -16.526,-66.321 r0 bottom
Z119 "" Short -16.526,-76.481 r0 bottom
Z120 "" Short -16.526,-63.781 r0 bottom
Z121 "" Short -16.526,-73.941 r0 bottom
Z122 "" Short -16.526,-84.101 r0 bottom
Z123 "" Short -19.616,-84.101 r0 bottom
Z124 "" Short -112.828,-75.471 r270 bottom
Z125 "" Short -110.428,-75.471 r270 bottom
Z126 "" Short -19.616,-34.571 r180 bottom
Z127 "" Short -19.616,-37.111 r180 bottom
Z128 "" Short -19.616,-39.651 r180 bottom
Z129 "" Short -19.616,-42.191 r180 bottom
Z130 "" Short -19.616,-44.731 r180 bottom
Z131 "" Short -19.616,-47.271 r180 bottom
Z132 "" Short -19.616,-49.811 r180 bottom
Z133 "" Short -19.616,-52.351 r180 bottom
Z134 "" Short -107.588,-36.471 r0 bottom
Z135 "" Short -107.588,-37.741 r0 bottom
Z136 "" Short -107.588,-39.011 r0 bottom
Z137 "" Short -107.588,-41.551 r0 bottom
Z138 "" Short -16.526,-79.021 r180 bottom
Z139 "" Short -16.526,-81.561 r180 bottom
Z140 "" Short -16.526,-68.861 r180 bottom
Z141 "" Short -16.526,-71.401 r180 bottom
Z142 "" Short -16.526,-58.701 r180 bottom
Z143 "" Short -16.526,-61.241 r180 bottom
Z144 "" Short -19.616,-58.701 r180 bottom
Z145 "" Short -19.616,-61.241 r180 bottom
Z146 "" Short -19.616,-63.781 r180 bottom
Z147 "" Short -19.616,-66.321 r180 bottom
Z148 "" Short -19.616,-68.861 r180 bottom
Z149 "" Short -19.616,-71.401 r180 bottom
Z150 "" Short -19.616,-73.941 r180 bottom
Z151 "" Short -19.616,-76.481 r180 bottom
Z152 "" Short -19.616,-79.021 r180 bottom
Z153 "" Short -19.616,-81.561 r180 bottom

## Footprints (in the part's own frame and the unit in brackets; to place one, negate y for a bottom-side part, rotate by r counter-clockwise, add the part's x,y. Pads: shape width x height; smd on the part's side, far side on the other; paste and mask are expansions set on the pad)
"100mil ScrewTerm" [mm]
  round 2 hole 1.1: 1(1.46,3.25) 2(4,3.25)
  silkscreen extent -0.04,-0.05 5.5,6.55, body extent -0.04,0 5.5,6.5, height 10
"2515 Resistor" [mm]
  rect 2x3.2 smd: 1(-3.25,0) 2(3.25,0)
  silkscreen extent -5.15,-2.5 5.15,2.5
ADM1191 [mm]
  oval 1.75x0.3 smd: 1(-2.05,1) 2(-2.05,0.5) 3(-2.05,0) 4(-2.05,-0.5) 5(-2.05,-1) 6(2.05,-1) 7(2.05,-0.5) 8(2.05,0) 9(2.05,0.5) 10(2.05,1)
  silkscreen extent -2.17,-1.55 0.77,1.82, body extent -1.55,-1.55 1.55,1.55, height 1.1
CSCFootprint [mm]
  rect 2.794x0.737 smd: A1(-104.132,-7.21) A2(-100.068,-7.21) A3(-104.132,-8.48) A4(-100.068,-8.48) A5(-104.132,-9.75) A6(-100.068,-9.75) A7(-104.132,-11.02) A8(-100.068,-11.02) A9(-104.132,-12.29) A10(-100.068,-12.29)
  rect 1.5x1.5 hole 0.9: B1(-84.75,-27.15) C1(-1.02,-5.31) D1(-1.02,-26.9)
  round 1.5 hole 0.9: B2(-84.75,-29.69) B3(-84.75,-32.23) B4(-84.75,-34.77) B5(-84.75,-37.31) B6(-84.75,-39.85) C2(1.52,-5.31) C3(-1.02,-7.85) C4(1.52,-7.85) C5(-1.02,-10.39) C6(1.52,-10.39) C7(-1.02,-12.93) C8(1.52,-12.93) C9(-1.02,-15.47) C10(1.52,-15.47) C11(-1.02,-18.01) C12(1.52,-18.01) C13(-1.02,-20.55) C14(1.52,-20.55) C15(-1.02,-23.09) C16(1.52,-23.09) D2(1.52,-26.9) D3(-1.02,-29.44) D4(1.52,-29.44) D5(-1.02,-31.98) D6(1.52,-31.98) D7(-1.02,-34.52) D8(1.52,-34.52) D9(-1.02,-37.06) D10(1.52,-37.06) D11(-1.02,-39.6) D12(1.52,-39.6) D13(-1.02,-42.14) D14(1.52,-42.14) D15(-1.02,-44.68) D16(1.52,-44.68) D17(-1.02,-47.22) D18(1.52,-47.22) D19(-1.02,-49.76) D20(1.52,-49.76) D21(-1.02,-52.3) D22(1.52,-52.3) D23(-1.02,-54.84) D24(1.52,-54.84)
  round 6 hole 3.2: E1(-90,0) E2(0,0) E3(0,-60) E4(-90,-60)
  round 2 hole 1.1: F1(-101.29,-49.75) F2(-98.75,-49.75)
  silkscreen extent -106.1,-65 5,5, body extent -105.02,-53 -97.25,-6.57, height 10
DMP2004KDITR-ND [mm] "SOT23, 3-Leads, Body 3.0x2.5mm (max), Pitch 0.89mm, IPC Medium Density"
  rect 1.5x0.6 smd: 1(-0.9,0.89) 2(-0.9,-0.89) 3(0.951,0)
  silkscreen extent -1.02,-1.5 0.7,1.86, body extent -0.7,-1.5 0.7,1.5, height 1.2
DS18S20 [mm] "SOIC, 8-Leads, Body 5.0x4.0mm (max), Pitch 1.27mm, IPC Medium Density"
  oval 2.2x0.6 smd: 1(-2.4,1.905) 2(-2.4,0.635) 3(-2.4,-0.635) 4(-2.4,-1.905) 5(2.4,-1.905) 6(2.4,-0.635) 7(2.4,0.635) 8(2.4,1.905)
  silkscreen extent -2.53,-2.5 0.9,2.88, body extent -2,-2.5 2,2.5, height 1.75
DS2482-100 [mm] "SOIC, 8-Leads, Body 5.0x4.0mm (max), Pitch 1.27mm, IPC Medium Density"
  oval 2.2x0.6 smd: 1(-2.4,1.905) 2(-2.4,0.635) 3(-2.4,-0.635) 4(-2.4,-1.905) 5(2.4,-1.905) 6(2.4,-0.635) 7(2.4,0.635) 8(2.4,1.905)
  silkscreen extent -2.52,-2.5 0.9,2.88, body extent -2,-2.5 2,2.5, height 1.75
"HD-20 9 POS" [mm]
  round 1.8 hole 1.19: 1(-5.486,-1.422) 2(-2.743,-1.422) 3(0,-1.422) 4(2.743,-1.422) 5(5.486,-1.422) 6(-4.115,1.422) 7(-1.372,1.422) 8(1.372,1.422) 9(4.115,1.422)
  round 5 hole 3.18: 10(-12.497,0) 11(12.497,0)
  silkscreen extent -15.49,-3.17 15.49,9.53, body extent -15.52,-3.17 15.52,15.72, height 12.55
"HD-22 62 POS" [mm]
  rect 1.6x1.6 hole 1.19: 1(8.2,-2.54)
  round 1.6 hole 1.19: 2(10.61,-2.54) 3(13.02,-2.54) 4(15.43,-2.54) 5(17.84,-2.54) 6(20.25,-2.54) 7(22.66,-2.54) 8(25.07,-2.54) 9(27.48,-2.54) 10(29.89,-2.54) 11(32.3,-2.54) 12(34.71,-2.54) 13(37.12,-2.54) 14(39.53,-2.54) 15(41.94,-2.54) 16(44.35,-2.54) 17(46.76,-2.54) 18(49.17,-2.54) 19(51.61,-2.54) 20(54.02,-2.54) 21(56.43,-2.54) 22(6.99,0) 23(9.4,0) 24(11.81,0) 25(14.22,0) 26(16.63,0) 27(19.04,0) 28(21.45,0) 29(23.86,0) 30(26.27,0) 31(28.68,0) 32(31.09,0) 33(33.5,0) 34(35.91,0) 35(38.32,0) 36(40.73,0) 37(43.14,0) 38(45.55,0) 39(47.96,0) 40(50.37,0) 41(52.81,0) 42(55.22,0) 43(8.2,2.54) 44(10.61,2.54) 45(13.02,2.54) 46(15.43,2.54) 47(17.84,2.54) 48(20.25,2.54) 49(22.66,2.54) 50(25.07,2.54) 51(27.48,2.54) 52(29.89,2.54) 53(32.3,2.54) 54(34.71,2.54) 55(37.12,2.54) 56(39.53,2.54) 57(41.94,2.54) 58(44.35,2.54) 59(46.76,2.54) 60(49.17,2.54) 61(51.61,2.54) 62(54.02,2.54)
  round 4.2 hole 3.18: 63(0,0) 64(63.5,0)
  silkscreen extent -2.95,-4 66.45,11.43, body extent -2.92,-3.6 66.47,17.36, height 12.45
HDR1X2 [mm] "Connector; Header; 2 Position"
  rect 1.5x1.5 hole 0.9: 1(0,0)
  round 1.5 hole 0.9: 2(2.54,0)
  silkscreen extent -1.27,-1.27 3.81,1.27
J1205M [mm] "Chip Resistor, 2-Leads, Body 1.0x0.5mm, IPC Medium Density"
  rect 0.8x1.3 smd: 1(-1.109,0) 2(-0.009,0) 3(1.091,0)
  body extent -1.32,-0.51 1.35,0.51, height 0.6
"MOLEX 444280802" [mm] "B2B RA Header"
  rrect50% 2x2 hole 1: 1(4.5,8.509)
  round 2 hole 1: 2(4.5,11.506) 3(1.5,8.509) 4(1.5,11.506) 5(-1.5,8.509) 6(-1.5,11.506) 7(-4.5,8.509) 8(-4.5,11.506)
  round 0 hole 3 unplated: M1(-2.34,0) M2(2.34,0)
  silkscreen extent -9.5,-5.84 9.5,5.84, body extent -9.5,-5.84 9.5,12.87, height 11.95
R0402M [mm] "Chip Resistor, 2-Leads, Body 1.0x0.5mm, IPC Medium Density"
  rect 0.8x0.7 smd: 1(-0.55,0) 2(0.55,0)
  body extent -0.55,-0.3 0.55,0.3, height 0.6
Short [mm]
  rect 0.8x0.7 smd: 1(-0.55,0) 2(0.55,0)
  Top Layer lines w0.2: -0.55,0 0.55,0
  body extent -0.55,-0.3 0.55,0.3, height 0.6

## Part data
C1: library part "0805 MLCC - X7R, 10%", "0805 MLCC - X7R, 10%"
J1 J6 J7: library part "Header 2", "Header, 2-Pin"
J2 J3 J4 J5: "Header, 2-Pin"
J8 J9 J10: library part "MOLEX 444280802", "B2B RA Header"
JP1 JP2: library part "Header 3", "Header, 3-Pin"
Q1: "MOSFET P-CH 20V 600MA SOT23-3"
R1 R18 R19 Z1 Z2 Z3 Z4 Z5 Z6 Z7 Z8 Z9 Z10 Z11 Z12 Z13 Z14 Z15 Z16 Z17 Z18 Z19 Z20 Z21 Z22 Z23 Z24 Z25 Z26 Z27 Z28 Z29 Z30 Z31 Z32 Z33 Z34 Z35 Z36 Z37 Z38 Z39 Z40 Z41 Z42 Z43 Z44 Z45 Z46 Z47 Z48 Z49 Z50 Z51 Z52 Z53 Z54 Z55 Z56 Z57 Z58 Z59 Z60 Z61 Z62 Z63 Z64 Z65 Z66 Z67 Z68 Z69 Z70 Z71 Z72 Z73 Z74 Z75 Z76 Z77 Z78 Z79 Z80 Z81 Z82 Z83 Z84 Z85 Z86 Z87 Z88 Z89 Z90 Z91 Z92 Z93 Z94 Z95 Z96 Z97 Z98 Z99 Z100 Z101 Z102 Z103 Z104 Z105 Z106 Z107 Z108 Z109 Z110 Z111 Z112 Z113 Z114 Z115 Z116 Z117 Z118 Z119 Z120 Z121 Z122 Z123 Z124 Z125 Z126 Z127 Z128 Z129 Z130 Z131 Z132 Z133 Z134 Z135 Z136 Z137 Z138 Z139 Z140 Z141 Z142 Z143 Z144 Z145 Z146 Z147 Z148 Z149 Z150 Z151 Z152 Z153: library part Res3, "Resistor"
R2 R3 R4 R5 R6 R7 R10_PM1 R10_PM2 R10_PM3 R10_PM4 R10_PM5 R10_PM6 R10_PM7 R10_PM8 R10_PM9 R10_PM10 R10_PM11 R10_PM12 R10_PM13 R10_PM14 R10_PM15 R10_PM16 R11_PM1 R11_PM2 R11_PM3 R11_PM4 R11_PM5 R11_PM6 R11_PM7 R11_PM8 R11_PM9 R11_PM10 R11_PM11 R11_PM12 R11_PM13 R11_PM14 R11_PM15 R11_PM16 R12_PM1 R12_PM2 R12_PM3 R12_PM4 R12_PM5 R12_PM6 R12_PM7 R12_PM8 R12_PM9 R12_PM10 R12_PM11 R12_PM12 R12_PM13 R12_PM14 R12_PM15 R12_PM16 R13_PM1 R13_PM2 R13_PM3 R13_PM4 R13_PM5 R13_PM6 R13_PM7 R13_PM8 R13_PM9 R13_PM10 R13_PM11 R13_PM12 R13_PM13 R13_PM14 R13_PM15 R13_PM16 R14_PM1 R14_PM2 R14_PM3 R14_PM4 R14_PM5 R14_PM6 R14_PM7 R14_PM8 R14_PM9 R14_PM10 R14_PM11 R14_PM12 R14_PM13 R14_PM14 R14_PM15 R14_PM16 R15_PM1 R15_PM2 R15_PM3 R15_PM4 R15_PM5 R15_PM6 R15_PM7 R15_PM8 R15_PM9 R15_PM10 R15_PM11 R15_PM12 R15_PM13 R15_PM14 R15_PM15 R15_PM16 R16_PM1 R16_PM2 R16_PM3 R16_PM4 R16_PM5 R16_PM6 R16_PM7 R16_PM8 R16_PM9 R16_PM10 R16_PM11 R16_PM12 R16_PM13 R16_PM14 R16_PM15 R16_PM16 R17_PM1 R17_PM2 R17_PM3 R17_PM4 R17_PM5 R17_PM6 R17_PM7 R17_PM8 R17_PM9 R17_PM10 R17_PM11 R17_PM12 R17_PM13 R17_PM14 R17_PM15 R17_PM16: library part Res1, "Resistor"
R8: library part "0603 Thick Film Resistor 1%", "0603 Thick Film Resistor 1%"
R9: library part "0805 Thick Film Resistor 1%", "0805 Thick Film Resistor 1%"
TR1: "Receptacle Assembly, 9 Position, Right Angle"
TR2: library part "Connector 62"
U2: library part DS18S20

## Free pads (board coordinates)
  round 6 hole 3.1: 0(-186.25,-93) 0(-182.25,-14) 0(-16.25,-14)
  round 7 hole 3.5: 0(-99.25,-14)

## Via types
v1: diameter 0.7, hole 0.3, Top Layer to Bottom Layer, tented both sides, 256 vias
v2: diameter 1, hole 0.5, Top Layer to Bottom Layer, tented both sides, 61 vias
v3: diameter 0.6, hole 0.3, Top Layer to Bottom Layer, tented both sides, 37 vias
v4: diameter 0.6, hole 0.3, Top Layer to Bottom Layer, tented bottom, 20 vias
v5: diameter 0.7, hole 0.3, Top Layer to Bottom Layer, tented top, 5 vias
v6: diameter 0.5, hole 0.3, Top Layer to Bottom Layer, tented both sides, 1 vias

## Nets (pads, with @x,y where several pads share a name; then routed paths per layer and width w, separated by ;. In a path a pad name is that pad's centre, name@x,y a point inside that pad or via, vN(x,y) a via of type N, cw(c..) or ccw(c..) an arc to the next point about the centre after c; other vN are vias at no path point)
3V3_BUS: C1.2 J6.1 JP1.1 JP2.1 R2.1 R3.1 R4.1 R5.1 R6.1 R7.1 R8.2 R9.2 R10_PM16.1 R13_PM2.1 R13_PM16.2 R14_PM1.1 R14_PM2.1 R14_PM3.1 R14_PM4.1 R14_PM5.1 R14_PM6.1 R14_PM7.1 R14_PM8.1 R14_PM9.1 R14_PM10.1 R14_PM11.1 R14_PM12.1 R14_PM13.1 R14_PM14.1 R14_PM15.1 R14_PM16.1 R16_PM1.1 R16_PM2.1 R16_PM3.1 R16_PM4.1 R16_PM5.1 R16_PM6.1 R16_PM7.1 R16_PM8.1 R16_PM9.1 R16_PM10.1 R16_PM11.1 R16_PM12.1 R16_PM13.1 R16_PM14.1 R16_PM15.1 R16_PM16.1 U1.1 U3_PM1.3 U3_PM2.2 U3_PM2.3 U3_PM3.3 U3_PM4.3 U3_PM5.3 U3_PM6.3 U3_PM7.3 U3_PM8.3 U3_PM9.3 U3_PM10.3 U3_PM11.3 U3_PM12.3 U3_PM13.3 U3_PM14.3 U3_PM15.3 U3_PM16.1 U3_PM16.3 Z21.2 Z25.2 Z59.2 | length 149.9
  Top Layer w0.254: v1(-187.816,-40.561) R16_PM8.1@-186.716,-40.561 ; v1(-187.816,-38.761) R14_PM8.1@-186.716,-38.761 ; v1(-187.775,-63.244) R16_PM6.1@-186.675,-63.244 ; v1(-187.775,-61.444) R14_PM6.1@-186.675,-61.444 ; v1(-187.775,-51.814) R16_PM7.1@-186.675,-51.814 ; v1(-187.775,-50.014) R14_PM7.1@-186.675,-50.014 ; v1(-184.7,-55) -184.414,-54.714 U3_PM7.3@-182.925,-54.714 ; v5(-184.7,-43.7) -184.461,-43.461 U3_PM8.3@-182.966,-43.461 ; v1(-184.6,-66.4) -184.3,-66.1 U3_PM6.3@-182.969,-66.1 ; v1(-175.016,-63.261) R16_PM2.1@-173.916,-63.261 ; v1(-175.016,-61.461) R14_PM2.1@-173.916,-61.461 ; v1(-175.016,-38.761) R14_PM9.1@-173.916,-38.761 ; v1(-174.975,-51.929) R16_PM16.1@-173.875,-51.929 ; v1(-174.975,-50.129) R14_PM16.1@-173.875,-50.129 ; v1(-174.666,-40.561) R16_PM9.1@-173.916,-40.561 ; v5(-172,-43.8) -171.661,-43.461 U3_PM9.3@-170.166,-43.461 ; v1(-171.9,-66.5) -171.561,-66.161 U3_PM2.3@-170.166,-66.161 ; R13_PM2.1@-167.154,-62.587 v1(-167.154,-61.487) ; v1(-167.154,-59.496) R13_PM16.2@-167.154,-58.396 ; R13_PM2.1@-166.138,-62.587 v1(-166.138,-61.487) ; v1(-166.138,-59.496) R13_PM16.2@-166.138,-58.396 ; v1(-162.275,-61.529) R14_PM12.1@-161.175,-61.529 ; v1(-162.275,-51.929) R16_PM15.1@-161.175,-51.929 ; v1(-162.275,-50.129) R14_PM15.1@-161.175,-50.129 ; v1(-162.175,-40.529) R16_PM14.1@-161.075,-40.529 ; v1(-162.175,-38.729) R14_PM14.1@-161.075,-38.729 ; v1(-161.991,-63.329) R16_PM12.1@-161.175,-63.329 ; v1(-159.2,-66.5) -158.929,-66.229 U3_PM12.3@-157.425,-66.229 ; v5(-159.1,-43.7) -158.829,-43.429 U3_PM14.3@-157.325,-43.429 ; -158.929,-54.829 U3_PM15.3@-157.425,-54.829 ; v1(-149.416,-50.061) R14_PM10.1@-148.316,-50.061 ; v1(-149.375,-61.429) R14_PM11.1@-148.275,-61.429 ; v1(-149.375,-38.729) R14_PM13.1@-148.275,-38.729 ; v1(-149.116,-51.861) R16_PM10.1@-148.316,-51.861 ; v1(-149.066,-40.529) R16_PM13.1@-148.275,-40.529 ; v1(-148.991,-63.229) R16_PM11.1@-148.275,-63.229 ; v1(-146.2,-66.4) -145.929,-66.129 U3_PM11.3@-144.525,-66.129 ; v1(-146.1,-55) -145.861,-54.761 U3_PM10.3@-144.566,-54.761 ; v5(-146.1,-43.7) -145.829,-43.429 U3_PM13.3@-144.525,-43.429 ; v1(-136.475,-50.029) R14_PM3.1@-135.375,-50.029 ; v1@-136.475,-38.729 R14_PM5.1@-135.375,-38.729 ; v1(-136.416,-63.211) R16_PM4.1@-135.316,-63.211 ; v1(-136.416,-61.411) R14_PM4.1@-135.316,-61.411 ; v1(-136.166,-40.529) R16_PM5.1@-135.375,-40.529 ; v1(-136.141,-51.829) R16_PM3.1@-135.375,-51.829 ; v1(-133.4,-55) -133.129,-54.729 U3_PM3.3@-131.625,-54.729 ; v5(-133.4,-43.7) -133.129,-43.429 U3_PM5.3@-131.625,-43.429 ; v1(-133.3,-66.4) -133.011,-66.111 U3_PM4.3@-131.566,-66.111 ; U3_PM1.3@-115.441,-57.324 v1@-114.024,-57.324 ; R14_PM1.1@-111.691,-62.024 v1(-110.591,-62.024) ; R16_PM1.1@-111.691,-60.224 v1(-110.591,-60.224) ; R8.2@-63.216,-79.611 -60.216,-79.611 C1.2@-58.266,-77.661 ; R9.2@-55.216,-87.111 v1(-55.216,-85.702) ; JP1.1@-50.716,-80.552 v1(-50.716,-79.143) ; JP2.1@-47.716,-80.552 v1(-47.716,-79.143) ; v1(-27.125,-55.911) R6.1@-24.516,-55.911 ; v1(-24.516,-60.32) R7.1@-24.516,-58.911 ; R2.1@-24.266,-77.661 v1(-24.266,-76.252) ; v1(-24.266,-71.57) R5.1@-24.266,-70.161 ; v1(-24.266,-68.57) R4.1@-24.266,-67.161 ; v1(-24.216,-81.57) R3.1@-24.216,-80.161
  Top Layer w0.3: R10_PM16.1@-172.175,-59.379 -173.175,-59.379 -173.175,-56.829 -172.175,-55.829 ; U3_PM2.2@-170.166,-66.661 -167.766,-66.661 -166.016,-64.911 R13_PM2.1@-166.016,-62.911 ; U3_PM16.1@-170.125,-55.829 -172.175,-55.829 ; U3_PM16.1@-170.125,-55.8 -167.004,-55.8 -165.975,-56.829 R13_PM16.2@-165.975,-58.079 ; U3_PM16.3@-170.125,-54.829 -171.175,-54.829 -172.175,-55.829
  Bottom Layer w0.254: Z25.2@-54.233,-21.352 -54.233,-22.644 v3(-54.216,-22.661) ; v1(-49.153,-22.622) Z21.2@-49.153,-21.352 ; v1(-32.966,-82.911) -25.557,-82.911 v1(-24.216,-81.57) -24.266,-81.52 v1(-24.266,-76.252) v1(-24.266,-71.57) v1(-24.266,-68.57) -24.266,-66.461 -21.966,-64.161 -21.966,-60.521 -26.576,-55.911 v1(-27.125,-55.911) ; v1(-24.516,-60.32) -24.516,-58.021
  Bottom Layer w0.457: v1(-153.305,-27.844) Z59.2@-153.305,-27.125
  other v1: -31.966,-82.911 -59.266,-78.661 -114,-57.3 -159.2,-55.1 -136.42,-38.711
3V3_BUS_IN: R10_PM2.1 R13_PM2.2 U3_PM2.1 Z89.1 | length 74
  Top Layer w0.3: R10_PM2.1@-172.216,-70.711 -173.216,-70.711 -173.216,-68.161 -172.216,-67.161 U3_PM2.1@-170.166,-67.161 ; U3_PM2.1@-170.166,-67.132 -167.045,-67.132 -166.016,-68.161 R13_PM2.2@-166.016,-69.411
  Top Layer w0.508: R13_PM2.2@-166.016,-69.411 -166.016,-72.461 v2(-165.541,-72.936)
  Bottom Layer w0.508: v2(-165.541,-72.936) -165.041,-73.436 -134.216,-73.436 -127.791,-79.861 -127.791,-84.536 -126.891,-85.436 -122.541,-85.436 -121.841,-84.736 -121.841,-81.161 -121.071,-80.391 Z89.1@-120.25,-80.391
3V3_CSC: R13_PM16.1 R18.1 U3_PM16.2 Z96.1 Z116.1 Z117.1 Z118.1 Z119.1 | length 41.1
  Top Layer w0.254: R13_PM16.1@-167.027,-51.284 v1(-167.027,-50.184) ; R13_PM16.1@-165.249,-51.284 v1(-165.249,-50.184) ; R18.1@-110.955,-86.8 -101.25,-77.095 v4(-101.25,-71.5)
  Top Layer w0.3: U3_PM16.2@-170.125,-55.329 -167.725,-55.329 -165.975,-53.579 R13_PM16.1@-165.975,-51.579
  Bottom Layer w0.254: v1(-122.616,-36.061) -122.616,-36.431 -122.571,-36.476 -120.693,-36.476 Z96.1@-120.688,-36.471 ; v1(-20.336,-75.211) -18.371,-75.211 Z119.1@-17.101,-76.481 ; v1(-20.336,-65.051) -18.371,-65.051 Z118.1@-17.101,-66.321 ; Z117.1@-20.166,-56.161 v1(-20.166,-54.721) ; Z116.1@-17.076,-56.161 v1(-17.076,-54.721)
3V3_PL: R13_PM3.1 U3_PM3.2 Z34.2 | length 36.3
  Top Layer w0.3: U3_PM3.2@-131.625,-55.229 -129.225,-55.229 -127.475,-53.479 R13_PM3.1@-127.475,-51.479
  Top Layer w0.508: R13_PM3.1@-127.475,-51.479 -127.475,-50.095 -123.391,-46.011 -123.391,-27.586 -124.18,-26.798 -124.18,-24.969 v2(-124.171,-24.961)
  Bottom Layer w0.508: Z34.2@-124.385,-24.125 -124.385,-24.747 v2(-124.171,-24.961)
3V3_PL_IN: R10_PM3.1 R13_PM3.2 U3_PM3.1 Z88.1 | length 50.5
  Top Layer w0.3: R10_PM3.1@-133.675,-59.279 -134.675,-59.279 -134.675,-56.729 -133.675,-55.729 U3_PM3.1@-131.625,-55.729 ; U3_PM3.1@-131.625,-55.7 -128.504,-55.7 -127.475,-56.729 R13_PM3.2@-127.475,-57.979
  Top Layer w0.508: R13_PM3.2@-127.475,-57.979 -127.475,-59.227 -126.566,-60.136 -124.441,-60.136 -121.216,-63.361 -121.216,-78.111 -121.656,-78.551 -121.656,-87.816 -121.216,-88.257 v2(-121.216,-90.511)
  Bottom Layer w0.508: v2(-121.216,-90.511) -121.196,-90.491 Z88.1@-120.25,-90.491
5V0_BUS: J7.1 R13_PM4.1 U3_PM4.2 | length 26.4
  Top Layer w0.3: U3_PM4.2@-131.566,-66.611 -129.166,-66.611 -127.416,-64.861 R13_PM4.1@-127.416,-62.861
  Top Layer w0.508: R13_PM4.1@-127.416,-62.861 -127.416,-61.486 -127.141,-61.211 -125.041,-61.211 -122.541,-63.711 -122.466,-63.711 v2(-122.316,-63.861)
  Bottom Layer w0.508: v2(-122.316,-63.861) -116.166,-70.011 J7.1@-113.066,-70.011
5V0_BUS_IN: R10_PM4.1 R13_PM4.2 U3_PM4.1 Z93.1 | length 24.4
  Top Layer w0.3: R10_PM4.1@-133.616,-70.661 -134.616,-70.661 -134.616,-68.111 -133.616,-67.111 U3_PM4.1@-131.566,-67.111 ; U3_PM4.1@-131.566,-67.082 -128.445,-67.082 -127.416,-68.111 R13_PM4.2@-127.416,-69.361
  Top Layer w0.508: R13_PM4.2@-127.416,-69.361 -127.416,-78.286 v2(-126.266,-79.436)
  Bottom Layer w0.508: v2(-126.266,-79.436) -126.25,-79.452 Z93.1@-126.25,-80.391
5V0_PL: R13_PM5.1 U3_PM5.2 Z38.2 | length 23.7
  Top Layer w0.3: U3_PM5.2@-131.625,-43.929 -129.225,-43.929 -127.475,-42.179 R13_PM5.1@-127.475,-40.361
  Top Layer w0.508: v2(-128.991,-24.961) -129,-24.969 -129,-29.903 -127.866,-31.036 -127.866,-39.97 R13_PM5.1@-127.475,-40.361
  Bottom Layer w0.508: Z38.2@-129.205,-24.125 -129.205,-24.747 v2(-128.991,-24.961)
5V0_PL_IN: R10_PM5.1 R13_PM5.2 U3_PM5.1 Z91.1 | length 48.3
  Top Layer w0.3: R10_PM5.1@-133.675,-47.979 -134.675,-47.979 -134.675,-45.429 -133.675,-44.429 U3_PM5.1@-131.625,-44.429 ; U3_PM5.1@-131.625,-44.4 -128.504,-44.4 -127.475,-45.429 R13_PM5.2@-127.475,-46.679
  Top Layer w0.508: v2@-127.475,-48.327 R13_PM5.2@-127.475,-46.679
  Bottom Layer w0.508: v2(-127.466,-48.336) -123.25,-52.552 Z91.1@-123.25,-80.391